# Allegro board RV1126_RV1109_Template_DDR3P216SD4_V10_20200901.brd
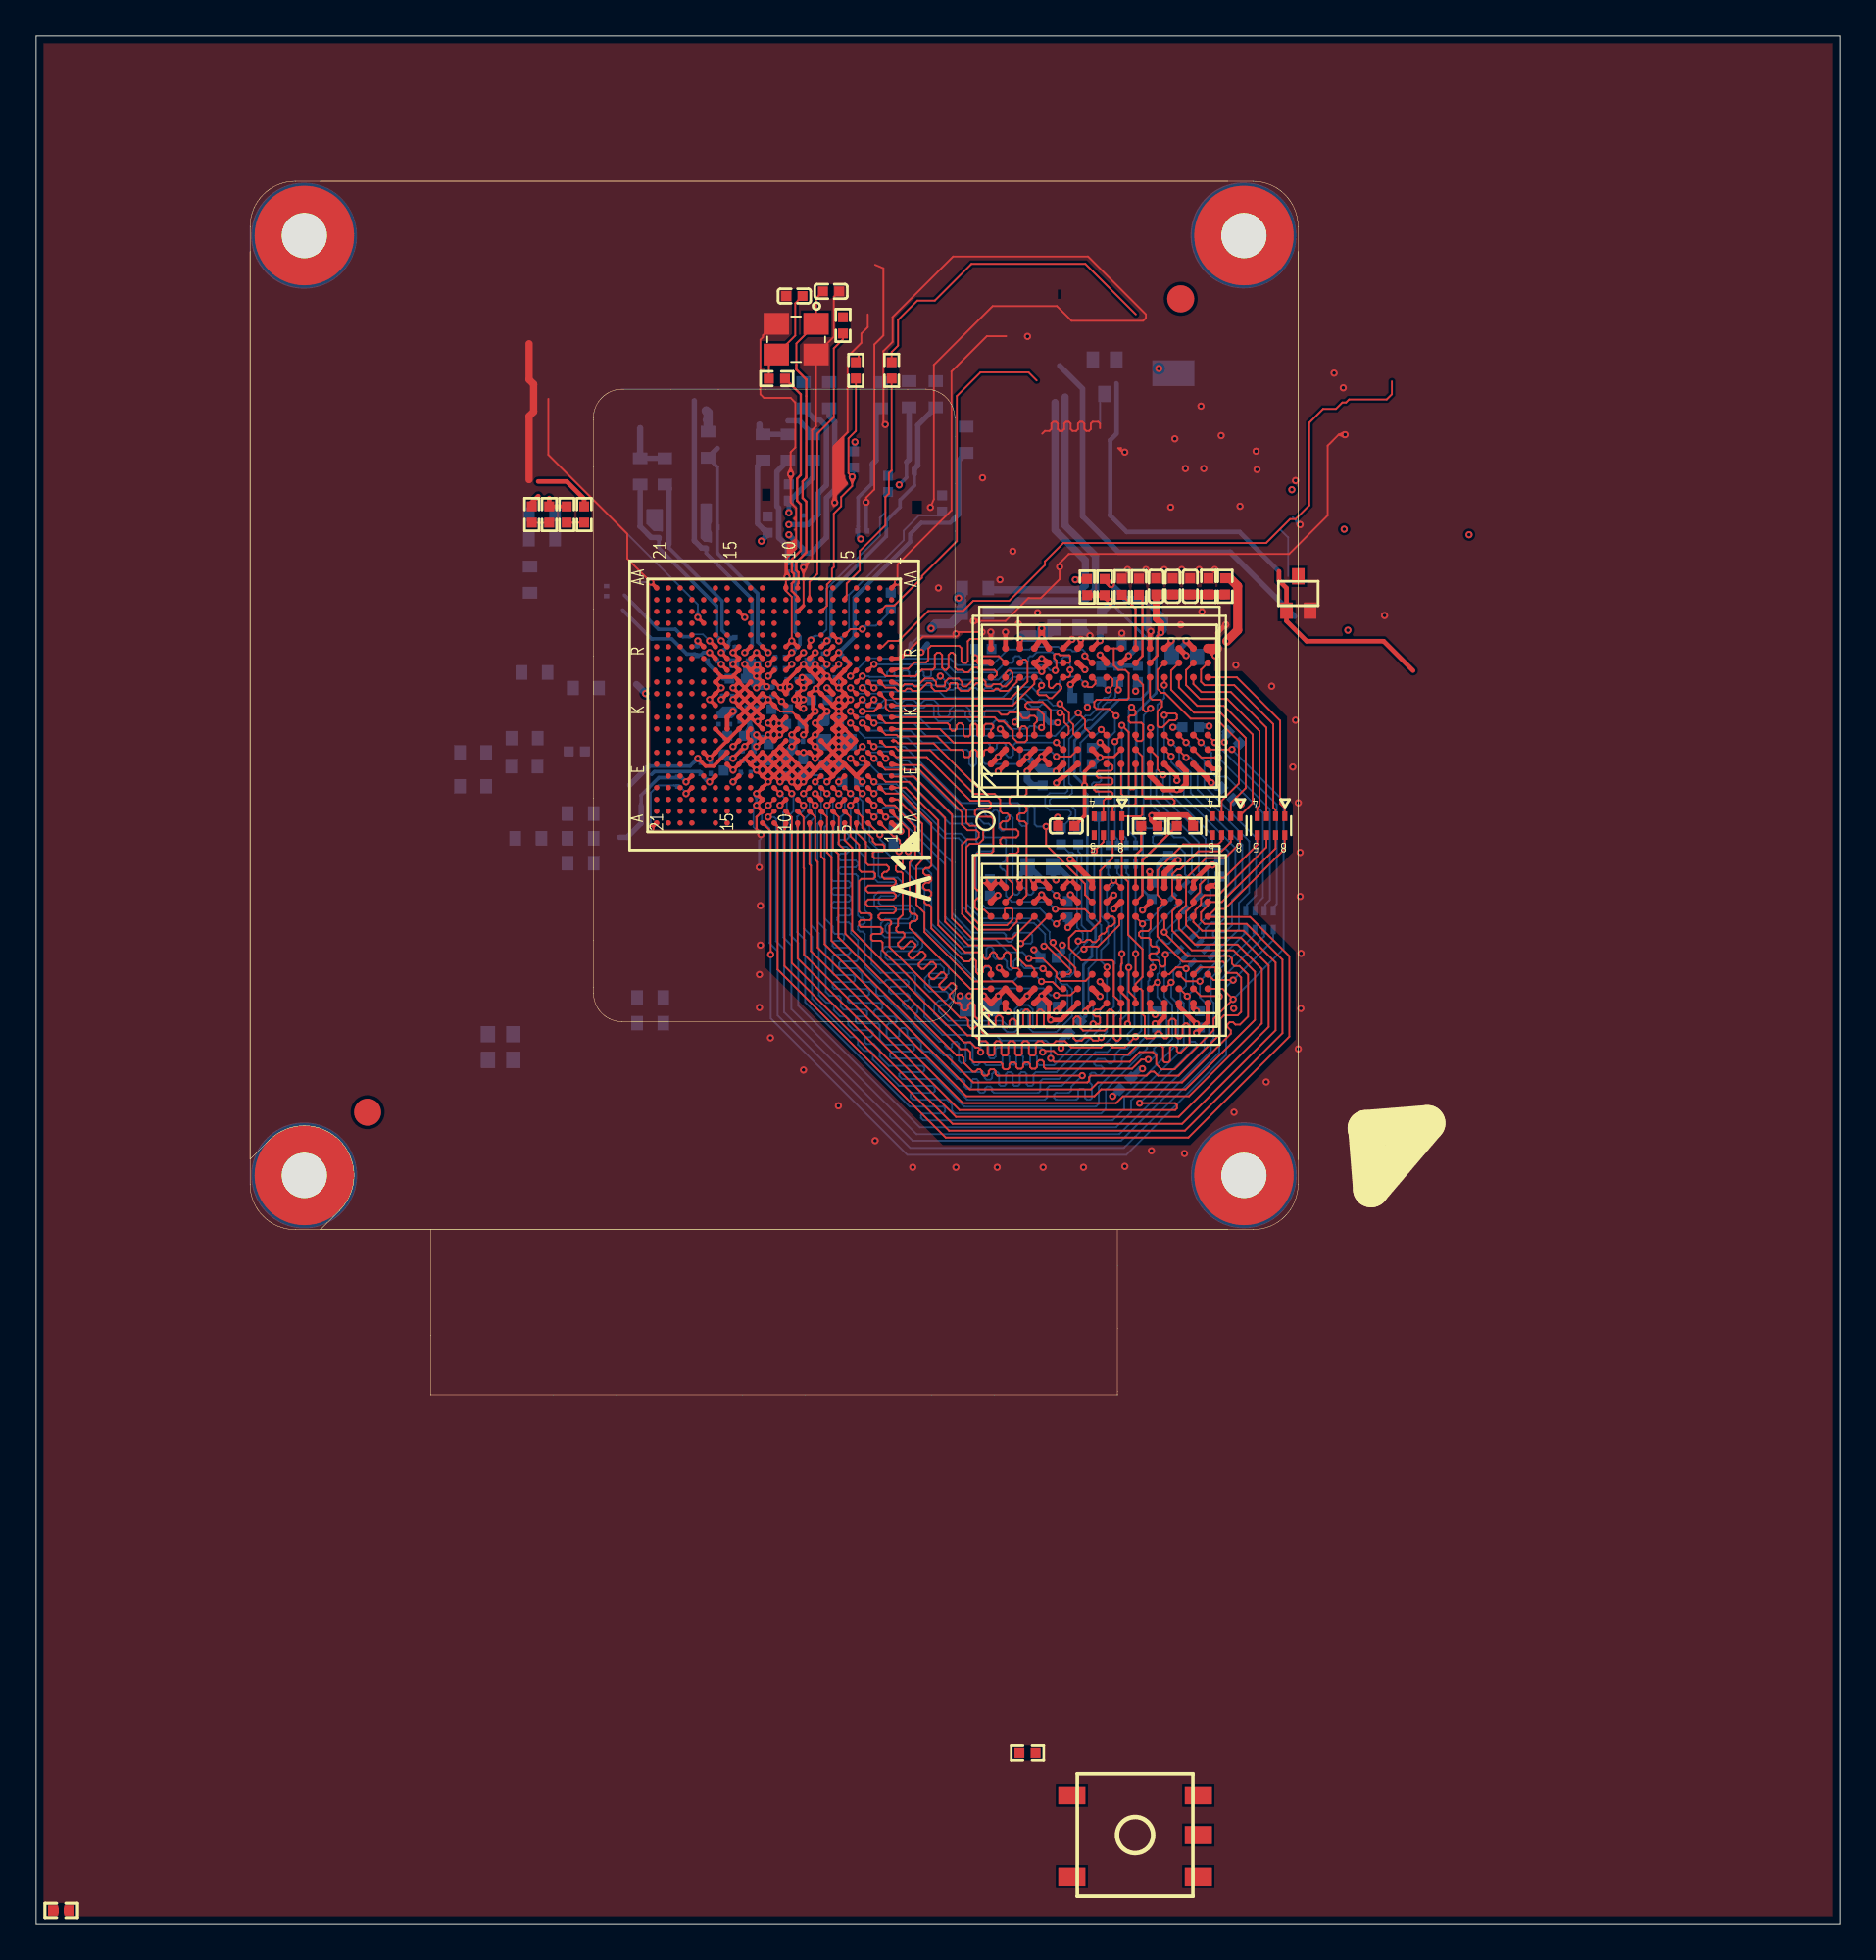
[diagram p0: board, top side]
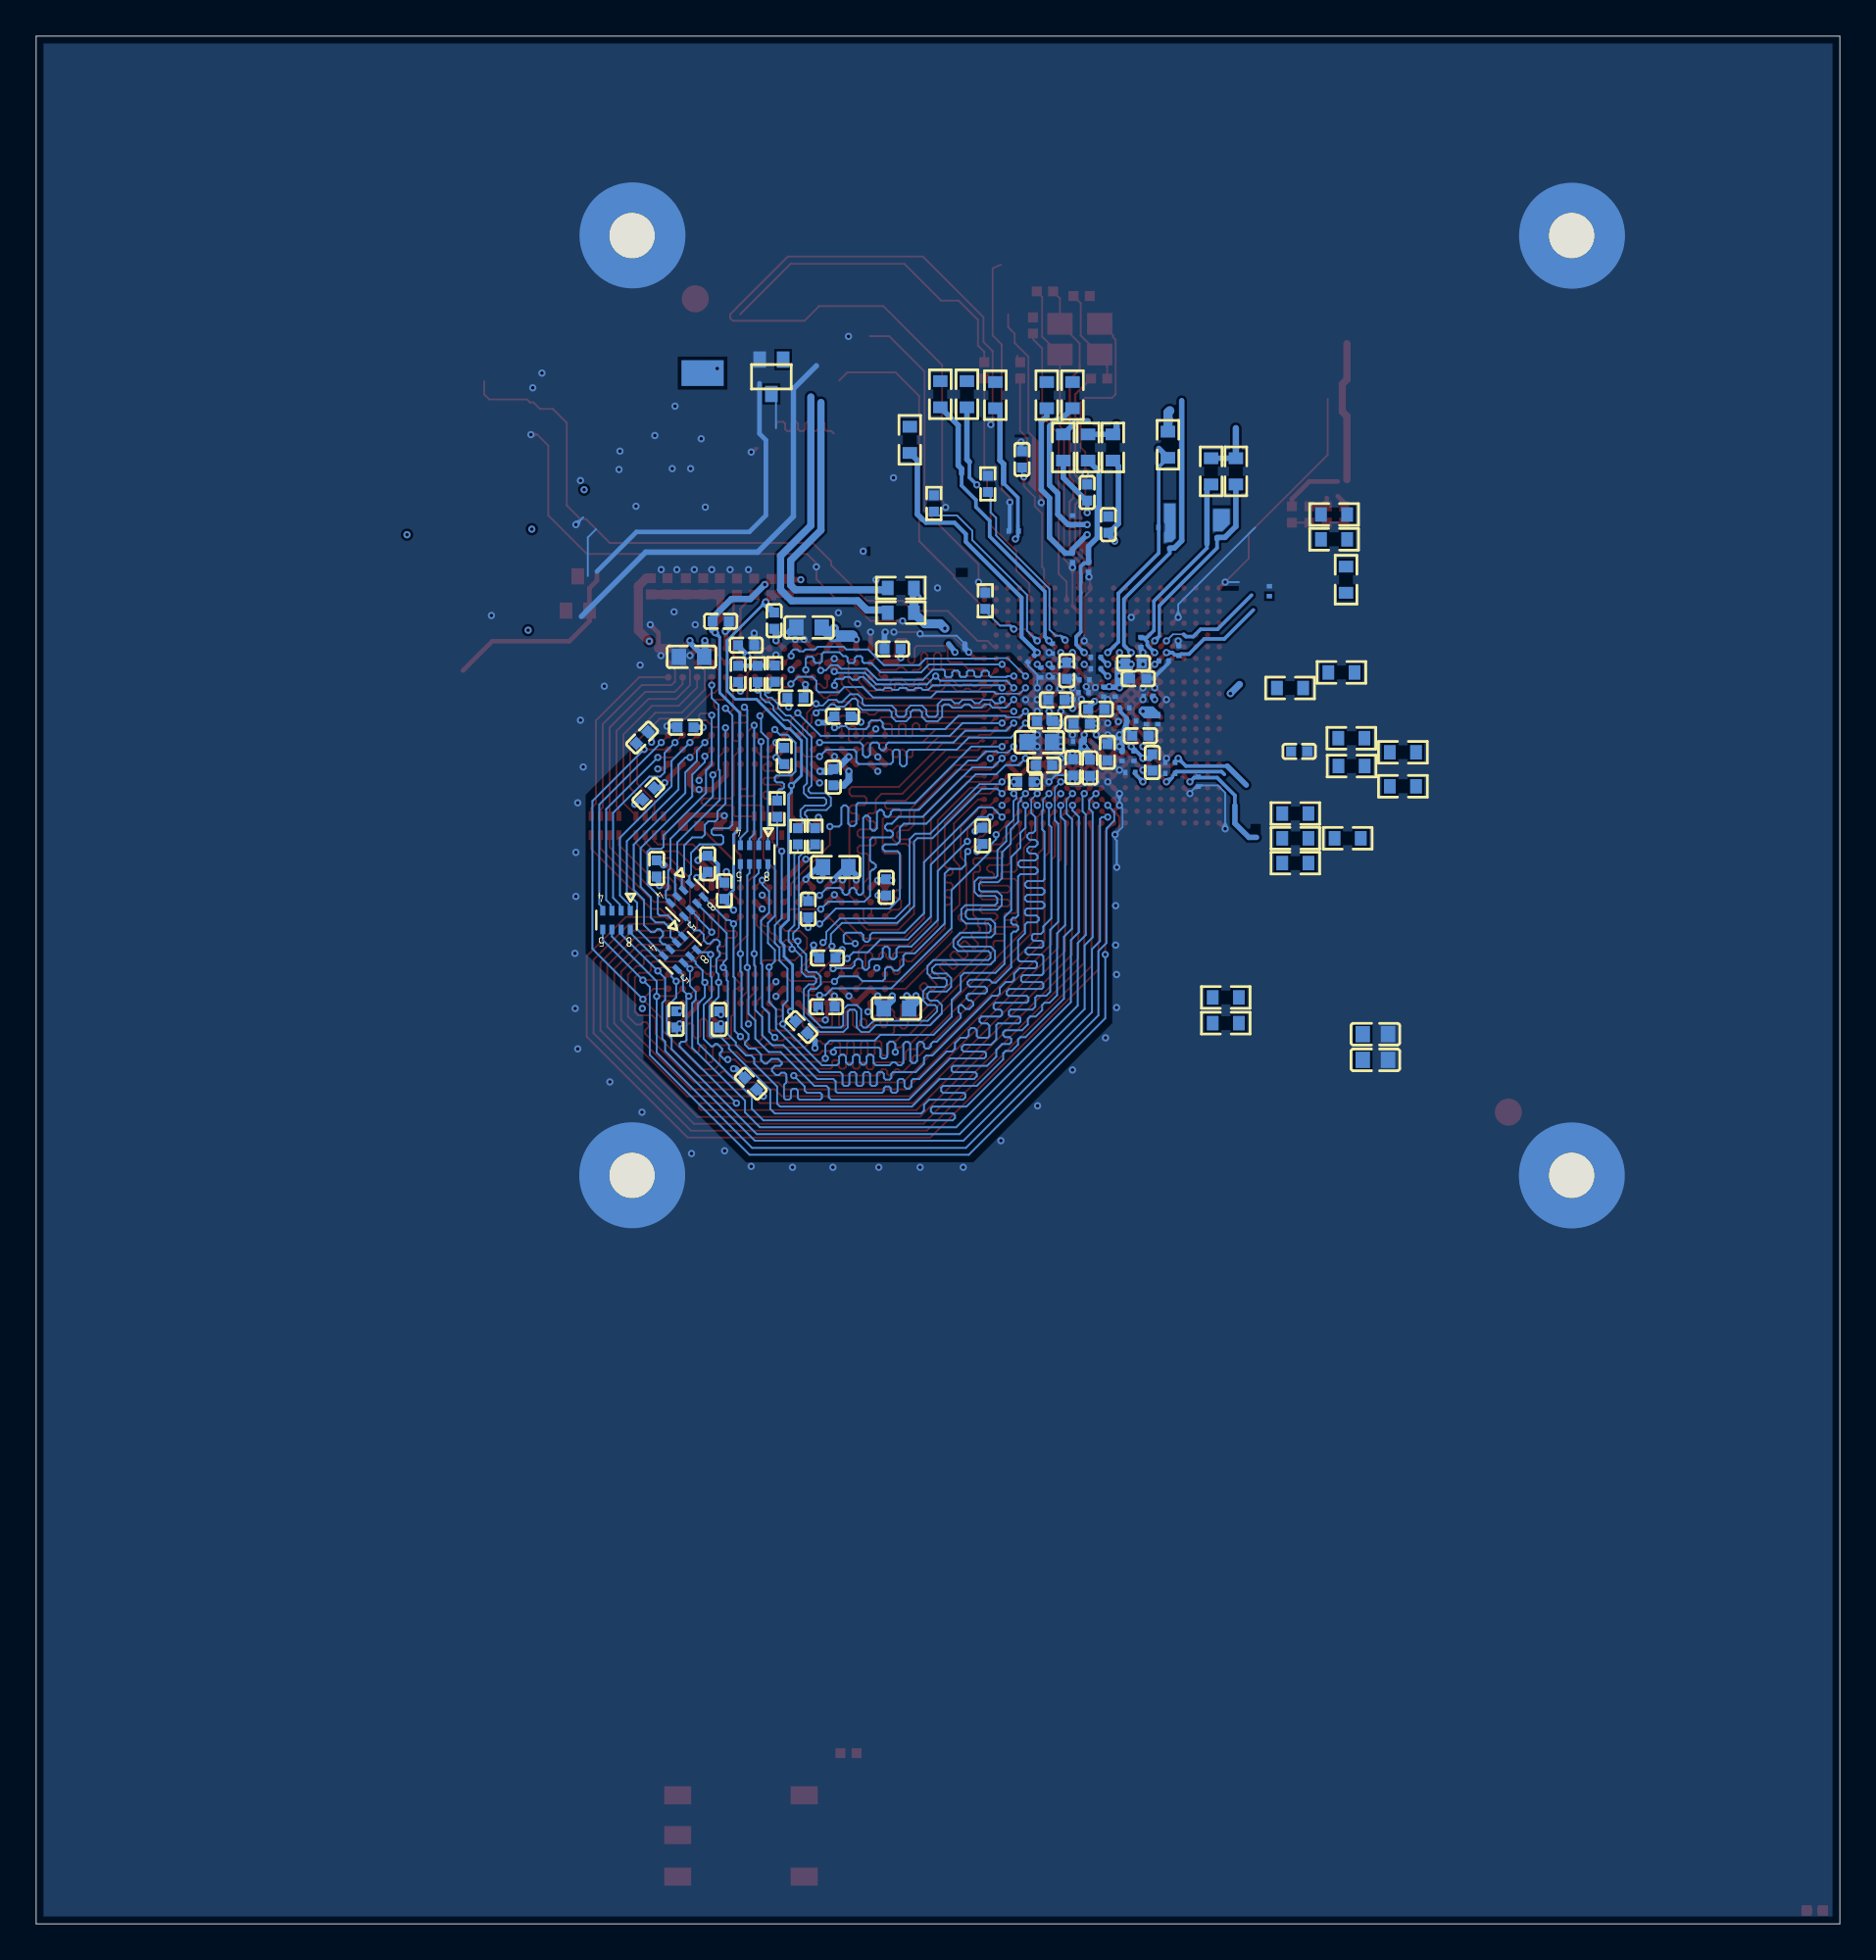
[diagram p1: board, bottom side, seen from below]

Outline 99.82 x 104.44 mm; copper layers: TOP, GND, POWER, BOTTOM. Coordinates in mm from the lower left corner of the outline.
Outline path: 0,104.44 99.82,104.44 99.82,0 0,0 0,104.44

## Placement (name value [footprint] x y rotation side)
C1000  .10  [C0402]  29.92 64.87 180 bottom
C1001  .10  [C0201]  39.73 64.62 270 bottom
C1002  .10  [C0201]  39.22 66.55 180 bottom
C1003  .10  [C0201]  39.6 67.28 180 bottom
C1004  .10  [C0402]  41.96 66.4 0 bottom
C1005  .10  [C0402]  40.54 64.82 270 bottom
C1006  .10  [C0402]  38.71 65.74 180 bottom
C1008  .10  [C0201]  42.16 65.43 0 bottom
C1009  .10  [C0201]  39.07 64.62 270 bottom
C1010  .10  [C0402]  41.15 67.21 180 bottom
C1011  .10  [C0402]  38.05 64.26 270 bottom
C1012  .10  [C0402]  41.5 63.96 270 bottom
C1014  .10  [C0201]  40.74 68.17 270 bottom
C1015  .10  [C0201]  40.11 68.17 270 bottom
C1016  .10  [C0402]  38.83 68.89 180 bottom
C1017  .10  [C0402]  39.09 69.75 180 bottom
C1019  .10  [C0201]  41.86 68.12 180 bottom
C1020  .10  [C0201]  41.81 68.83 180 bottom
C1021  .10  [C0402]  43.36 67.72 0 bottom
C1022  .10  [C0402]  42.78 69.33 90 bottom
C1024  .10  [C0603]  25.7 49.23 180 bottom
C1025  .10  [C0603]  25.7 47.8 180 bottom
C1100  .10  [C0402]  41.96 90.07 180 top
C1101  .10  [C0402]  43.99 90.32 180 top
C1102  .10  [C0201]  41.17 69.44 0 bottom
C1103  .10  [C0402]  45.26 81.03 270 bottom
C1104  .10  [C0201]  42.47 77.65 90 bottom
C1105  .10  [C0201]  42.47 75.62 270 bottom
C1106  .10  [C0201]  41.17 70.08 0 bottom
C1107  .10  [C0201]  41.58 75.08 270 bottom
C1108  .10  [C0201]  45.72 77.06 0 bottom
C1109  .10  [C0402]  41.66 79.2 90 bottom
C1110  .10  [C0402]  40.49 77.42 90 bottom
C1200  .10  [C0201]  1.39 0.74 0 top
C1201  .10  [C0201]  1.39 0.74 0 top
C1202  .10  [C0201]  1.39 0.74 0 top
C1203  .10  [C0402]  42.44 63.98 270 bottom
C1204  .10  [C0402]  44.04 64.11 0 bottom
C1205  .10  [C0402]  43.99 66.55 0 bottom
C1206  .10  [C0603]  44.3 65.38 0 bottom
C1300  .10  [C0201]  37.08 76.35 90 bottom
C1301  .10  [C0201]  44.22 69.24 270 bottom
C1302  .10  [C0201]  39.27 63.7 0 bottom
C1400  .10  [C0201]  43.59 70.56 270 bottom
C1401  .10  [C0201]  43.59 69.24 270 bottom
C1402  .10  [C0201]  44.75 70 315 bottom
C1500  .10  [C0201]  37.06 63.65 0 bottom
C1600  .10  [C0201]  37.41 69.88 180 bottom
C1601  .10  [C0201]  38.25 67.92 0 bottom
C1602  .10  [C0201]  36.58 70.43 90 bottom
C1603  .10  [C0201]  38.68 70.92 270 bottom
C1604  .10  [C0201]  31.57 73.74 90 bottom
C1605  .10  [C0201]  34.47 76.94 90 bottom
C1700  .10  [C0201]  35.51 63.2 270 bottom
C1701  .10  [C0201]  37.06 64.26 0 bottom
C1702  .10  [C0201]  38.38 66.65 270 bottom
C1703  .10  [C0201]  37.74 66.65 270 bottom
C1800  .10  [C0201]  37.44 77.27 180 bottom
C3000  .10  [C0402]  66.28 65.64 315 bottom
C3001  .10  [C0402]  60.97 69.16 270 bottom
C3002  .10  [C0603]  57.05 71.73 0 bottom
C3003  .10  [C0603]  55.58 58.47 0 bottom
C3004  .10  [C0402]  65.94 62.53 315 bottom
C3005  .10  [C0402]  65.48 58.39 270 bottom
C3006  .10  [C0402]  63.89 66.21 0 bottom
C3007  .10  [C0402]  55.19 66.81 0 bottom
C3008  .10  [C0402]  60.53 70.75 180 bottom
C3009  .10  [C0402]  55.7 63.44 270 bottom
C3010  .10  [C0402]  57.1 56.14 90 bottom
C3011  .10  [C0402]  57.8 67.83 0 bottom
C3012  .10  [C0402]  52.43 70.54 0 bottom
C3013  .10  [C0402]  60.27 46.49 225 bottom
C3014  .10  [C0402]  58.42 64.62 90 bottom
C3015  .10  [C0402]  62.9 74 90 top
C3016  .10  [C0402]  61.73 57.16 270 bottom
C3017  .10  [C0402]  61.94 72.07 180 bottom
C3018  .10  [C0402]  61.99 74 90 top
C3019  .10  [C0402]  63.87 74 90 top
C3020  .10  [C0603]  52.21 50.65 180 bottom
C3021  .10  [C0603]  63.55 70.1 0 bottom
C3022  .10  [C0402]  64.4 50.05 270 bottom
C3023  .10  [C0402]  47.45 60.2 90 bottom
C3024  .10  [C0402]  52.78 57.35 90 bottom
C3025  .10  [C0402]  56.08 50.74 180 bottom
C3026  .10  [C0402]  56.03 53.44 0 bottom
C3027  .10  [C0402]  62.66 58.65 270 bottom
C3028  .10  [C0402]  62.03 50.04 90 bottom
C3030  .10  [C0402]  57.46 49.62 225 bottom
C3031  .10  [C0402]  57.01 60.74 180 top
C3032  .10  [C0402]  58.98 72.11 90 bottom
Q1300  VAL  [SOT_323]  69.85 73.61 0 top
Q1301  VAL  [SOT_323]  59.13 85.6 0 bottom
R1000  .10  [R0603]  27.03 64.06 180 bottom
R1001  .10  [R0603]  24.18 62.94 0 bottom
R1100  .10  [R0402]  41 85.5 180 top
R1102  .10  [R0603]  42.98 81.69 90 bottom
R1103  .10  [R0603]  42.47 84.58 90 bottom
R1104  .10  [R0402]  47.15 79.67 90 bottom
R1105  .10  [R0402]  45.36 85.95 90 top
R1106  .10  [R0402]  47.35 85.95 90 top
R1108  .10  [R0603]  43.89 84.58 90 bottom
R1109  .10  [R0402]  44.65 88.44 90 top
R1110  .10  [R0603]  40.23 81.69 90 bottom
R1111  .10  [R0603]  41.61 81.69 90 bottom
R1112  .10  [R0603]  46.74 84.58 90 bottom
R1200  .10  [R0402]  45.07 63.19 0 bottom
R1300  .10  [R0603]  51.97 72.54 180 bottom
R1301  .10  [R0603]  51.97 73.91 180 bottom
R1302  .10  [R0603]  33.99 51.26 0 bottom
R1303  .10  [R0603]  33.99 49.83 0 bottom
R1304  .10  [R0402]  1.39 0.74 0 top
R1305  .10  [R0402]  1.39 0.74 0 top
R1306  .10  [R0402]  54.86 9.45 0 top
R1400  .10  [R0402]  50.14 78.59 90 bottom
R1401  .10  [R0402]  47.29 73.2 90 bottom
R1402  .10  [R0603]  49.78 84.63 270 bottom
R1403  .10  [R0603]  48.31 84.63 270 bottom
R1404  .10  [R0603]  51.47 82.11 270 bottom
R1500  .10  [R0603]  30.13 60.06 0 bottom
R1600  .10  [R0603]  27.33 74.37 270 bottom
R1601  .10  [R0402]  29.36 77.98 90 top
R1602  .10  [R0402]  28.4 77.98 90 top
R1603  .10  [R0603]  30.43 68.38 0 bottom
R1604  .10  [R0603]  27.58 69.24 0 bottom
R1605  .10  [R0603]  27.99 76.61 0 bottom
R1606  .10  [R0603]  34.8 80.37 270 bottom
R1607  .10  [R0603]  27.99 77.98 0 bottom
R1608  .10  [R0603]  33.43 80.37 270 bottom
R1609  .10  [R0402]  30.33 77.98 90 top
R1610  .10  [R0402]  27.43 77.98 90 top
R1700  .10  [R0603]  30.13 58.69 0 bottom
R1701  .10  [R0603]  30.13 61.43 0 bottom
R1702  .10  [R0603]  27.04 65.6 0 bottom
R1705  .10  [R0603]  24.18 64.82 0 bottom
R1800  .10  [R0603]  37.19 81.84 270 bottom
R1801  .10  [R0603]  27.24 60.06 180 bottom
R3000  .10  [R0402]  61.04 73.99 90 top
R3001  .10  [R0402]  63.58 60.74 0 top
R3002  .10  [R0402]  60.08 73.99 90 top
R3003  .10  [R0402]  61.61 60.74 0 top
R3004  .10  [R0402]  58.94 69.17 90 bottom
R3005  .10  [R0402]  59.89 69.16 90 bottom
R3006  .10  [R0402]  65.8 74 270 top
R3007  .10  [R0402]  64.88 74 90 top
R3008  .10  [R0402]  58.81 61.7 270 bottom
R3009  .10  [R0402]  57.67 60.17 270 bottom
R3010  .10  [R0402]  56.72 60.17 270 bottom
R3011  .10  [R0402]  59.13 73.96 270 top
R3012  .10  [R0402]  58.17 73.96 90 top
RP3000  VAL  [RP4_0408]  68.34 60.76 180 top
RP3001  VAL  [RP4_0408]  65.86 60.76 180 top
RP3002  VAL  [RP4_0408]  59.32 60.76 180 top
RP3003  VAL  [RP4_0408]  67.7 55.54 0 bottom
RP3004  VAL  [RP4_0408]  64.18 53.73 315 bottom
RP3005  VAL  [RP4_0408]  63.8 56.65 315 bottom
RP3006  VAL  [RP4_0408]  60.08 59.16 0 bottom
SW1300  -  [SW-5P]  60.82 4.92 180 top
U1000  -  [BGA409_58R00X58R00X42R69_S]  40.84 67.41 90 top
U3000  VAL  [FBGA96_14R00X11R00X1R20]  58.84 67.37 90 top
U3001  VAL  [FBGA96_14R00X11R00X1R20]  58.84 54.14 90 top
Y1100  VAL  [CRY4_3R20X2R50X0R80]  42.06 87.68 180 top

## Library data of the parts
C1000 C1004-C1006 C1010-C1012 C1016 C1017 C1021 C1022 C1100 C1101 C1103 C1109 C1110 C1203-C1205 C3000 C3001 C3004-C3019 C3022-C3028 C3030-C3032 = C0402
C1001-C1003 C1008 C1009 C1014 C1015 C1019 C1020 C1102 C1104-C1108 C1200-C1202 C1300-C1302 C1400-C1402 C1500 C1600-C1605 C1700-C1703 C1800 = C0201
C1024 C1025 C1206 C3002 C3003 C3020 C3021 = C0603
Q1300 Q1301 = SOT_323
R1000 R1001 R1102 R1103 R1108 R1110-R1112 R1300-R1303 R1402-R1404 R1500 R1600 R1603-R1608 R1700-R1702 R1705 R1800 R1801 = R0603
R1100 R1104-R1106 R1109 R1200 R1304-R1306 R1400 R1401 R1601 R1602 R1609 R1610 R3000-R3012 = R0402
RP3000-RP3006 = RP4_0408
SW1300 = SW-5P
U1000 = BGA409_58R00X58R00X42R69_S
U3000 U3001 = FBGA96_14R00X11R00X1R20
Y1100 = CRY4_3R20X2R50X0R80

## Footprints (pads in the part's own frame, mm; a bottom-side part is the same pattern mirrored in y, then rotated)
BGA409_58R00X58R00X42R69_S
  round 0.3 smd: A1(-6.5,-6.5) A2(-6.5,-5.85) A3(-6.5,-5.2) A4(-6.5,-4.55) A5(-6.5,-3.9) A6(-6.5,-3.25) A7(-6.5,-2.6) A8(-6.5,-1.95) A9(-6.5,-1.3) A10(-6.5,-0.65) A11(-6.5,0) A12(-6.5,0.65) A13(-6.5,1.3) A15(-6.5,2.6) A16(-6.5,3.25) A18(-6.5,4.55) A19(-6.5,5.2) A20(-6.5,5.85) A21(-6.5,6.5) AA1(6.5,-6.5) AA2(6.5,-5.85) AA3(6.5,-5.2) AA4(6.5,-4.55) AA6(6.5,-3.25) AA7(6.5,-2.6) AA9(6.5,-1.3) AA10(6.5,-0.65) AA12(6.5,0.65) AA13(6.5,1.3) AA15(6.5,2.6) AA16(6.5,3.25) AA18(6.5,4.55) AA19(6.5,5.2) AA20(6.5,5.85) AA21(6.5,6.5) B1(-5.85,-6.5) B2(-5.85,-5.85) B3(-5.85,-5.2) B4(-5.85,-4.55) B5(-5.85,-3.9) B6(-5.85,-3.25) B7(-5.85,-2.6) B8(-5.85,-1.95) B9(-5.85,-1.3) B10(-5.85,-0.65) B11(-5.85,0) B12(-5.85,0.65) B13(-5.85,1.3) B14(-5.85,1.95) B15(-5.85,2.6) B16(-5.85,3.25) B17(-5.85,3.9) B18(-5.85,4.55) B19(-5.85,5.2) B20(-5.85,5.85) B21(-5.85,6.5) C1(-5.2,-6.5) C2(-5.2,-5.85) C3(-5.2,-5.2) C4(-5.2,-4.55) C5(-5.2,-3.9) C6(-5.2,-3.25) C7(-5.2,-2.6) C8(-5.2,-1.95) C9(-5.2,-1.3) C10(-5.2,-0.65) C11(-5.2,0) C12(-5.2,0.65) C13(-5.2,1.3) C14(-5.2,1.95) C15(-5.2,2.6) C16(-5.2,3.25) C17(-5.2,3.9) C18(-5.2,4.55) C19(-5.2,5.2) C20(-5.2,5.85) C21(-5.2,6.5) D1(-4.55,-6.5) D2(-4.55,-5.85) D3(-4.55,-5.2) D4(-4.55,-4.55) D5(-4.55,-3.9) D6(-4.55,-3.25) D7(-4.55,-2.6) D8(-4.55,-1.95) D9(-4.55,-1.3) D10(-4.55,-0.65) D11(-4.55,0) D12(-4.55,0.65) D13(-4.55,1.3) D14(-4.55,1.95) D15(-4.55,2.6) D16(-4.55,3.25) D17(-4.55,3.9) D18(-4.55,4.55) D19(-4.55,5.2) D20(-4.55,5.85) D21(-4.55,6.5) E1(-3.9,-6.5) E2(-3.9,-5.85) E3(-3.9,-5.2) E4(-3.9,-4.55) E5(-3.9,-3.9) E6(-3.9,-3.25) E7(-3.9,-2.6) E8(-3.9,-1.95) E9(-3.9,-1.3) E10(-3.9,-0.65) E11(-3.9,0) E12(-3.9,0.65) E13(-3.9,1.3) E14(-3.9,1.95) E16(-3.9,3.25) E17(-3.9,3.9) E18(-3.9,4.55) E19(-3.9,5.2) E20(-3.9,5.85) F1(-3.25,-6.5) F2(-3.25,-5.85) F3(-3.25,-5.2) F4(-3.25,-4.55) F5(-3.25,-3.9) F6(-3.25,-3.25) F7(-3.25,-2.6) F8(-3.25,-1.95) F9(-3.25,-1.3) F10(-3.25,-0.65) F11(-3.25,0) F12(-3.25,0.65) F13(-3.25,1.3) F14(-3.25,1.95) F15(-3.25,2.6) F19(-3.25,5.2) F20(-3.25,5.85) F21(-3.25,6.5) G1(-2.6,-6.5) G2(-2.6,-5.85) G3(-2.6,-5.2) G4(-2.6,-4.55) G5(-2.6,-3.9) G6(-2.6,-3.25) G7(-2.6,-2.6) G8(-2.6,-1.95) G9(-2.6,-1.3) G10(-2.6,-0.65) G11(-2.6,0) G12(-2.6,0.65) G13(-2.6,1.3) G15(-2.6,2.6) G16(-2.6,3.25) G17(-2.6,3.9) G18(-2.6,4.55) G19(-2.6,5.2) G20(-2.6,5.85) G21(-2.6,6.5) H7(-1.95,-2.6) H8(-1.95,-1.95) H9(-1.95,-1.3) H10(-1.95,-0.65) H11(-1.95,0) H12(-1.95,0.65) H13(-1.95,1.3) H14(-1.95,1.95) H15(-1.95,2.6) H16(-1.95,3.25) H17(-1.95,3.9) H18(-1.95,4.55) H19(-1.95,5.2) H20(-1.95,5.85) J1(-1.3,-6.5) J2(-1.3,-5.85) J3(-1.3,-5.2) J4(-1.3,-4.55) J5(-1.3,-3.9) J6(-1.3,-3.25) J7(-1.3,-2.6) J9(-1.3,-1.3) J10(-1.3,-0.65) J11(-1.3,0) J12(-1.3,0.65) J13(-1.3,1.3) J14(-1.3,1.95) J15(-1.3,2.6) J16(-1.3,3.25) J17(-1.3,3.9) J18(-1.3,4.55) J19(-1.3,5.2) J20(-1.3,5.85) J21(-1.3,6.5) K1(-0.65,-6.5) K2(-0.65,-5.85) K3(-0.65,-5.2) K4(-0.65,-4.55) K5(-0.65,-3.9) K6(-0.65,-3.25) K7(-0.65,-2.6) K8(-0.65,-1.95) K9(-0.65,-1.3) K10(-0.65,-0.65) K11(-0.65,0) K12(-0.65,0.65) K13(-0.65,1.3) K14(-0.65,1.95) K15(-0.65,2.6) K16(-0.65,3.25) K17(-0.65,3.9) K18(-0.65,4.55) K19(-0.65,5.2) K20(-0.65,5.85) K21(-0.65,6.5) L1(0,-6.5) L2(0,-5.85) L3(0,-5.2) L4(0,-4.55) L5(0,-3.9) L6(0,-3.25) L7(0,-2.6) L9(0,-1.3) L10(0,-0.65) L11(0,0) L12(0,0.65) L13(0,1.3) L14(0,1.95) L16(0,3.25) L17(0,3.9) L19(0,5.2) L20(0,5.85) M1(0.65,-6.5) M2(0.65,-5.85) M3(0.65,-5.2) M4(0.65,-4.55) M5(0.65,-3.9) M6(0.65,-3.25) M7(0.65,-2.6) M8(0.65,-1.95) M9(0.65,-1.3) M10(0.65,-0.65) M11(0.65,0) M12(0.65,0.65) M13(0.65,1.3) M14(0.65,1.95) M15(0.65,2.6) M16(0.65,3.25) M17(0.65,3.9) M18(0.65,4.55) M19(0.65,5.2) M20(0.65,5.85) M21(0.65,6.5) N1(1.3,-6.5) N2(1.3,-5.85) N3(1.3,-5.2) N4(1.3,-4.55) N5(1.3,-3.9) N6(1.3,-3.25) N7(1.3,-2.6) N8(1.3,-1.95) N9(1.3,-1.3) N10(1.3,-0.65) N11(1.3,0) N12(1.3,0.65) N13(1.3,1.3) N14(1.3,1.95) N16(1.3,3.25) N17(1.3,3.9) N18(1.3,4.55) N19(1.3,5.2) N20(1.3,5.85) N21(1.3,6.5) P1(1.95,-6.5) P2(1.95,-5.85) P3(1.95,-5.2) P4(1.95,-4.55) P5(1.95,-3.9) P6(1.95,-3.25) P7(1.95,-2.6) P8(1.95,-1.95) P9(1.95,-1.3) P10(1.95,-0.65) P11(1.95,0) P12(1.95,0.65) P13(1.95,1.3) P14(1.95,1.95) P15(1.95,2.6) P16(1.95,3.25) P17(1.95,3.9) P19(1.95,5.2) P20(1.95,5.85) R1(2.6,-6.5) R2(2.6,-5.85) R3(2.6,-5.2) R4(2.6,-4.55) R5(2.6,-3.9) R6(2.6,-3.25) R7(2.6,-2.6) R8(2.6,-1.95) R9(2.6,-1.3) R10(2.6,-0.65) R11(2.6,0) R12(2.6,0.65) R13(2.6,1.3) R14(2.6,1.95) R15(2.6,2.6) R16(2.6,3.25) R17(2.6,3.9) R18(2.6,4.55) R19(2.6,5.2) R20(2.6,5.85) R21(2.6,6.5) T1(3.25,-6.5) T2(3.25,-5.85) T3(3.25,-5.2) T4(3.25,-4.55) T6(3.25,-3.25) T7(3.25,-2.6) T8(3.25,-1.95) T9(3.25,-1.3) T10(3.25,-0.65) T11(3.25,0) T12(3.25,0.65) T13(3.25,1.3) T14(3.25,1.95) T15(3.25,2.6) T16(3.25,3.25) T17(3.25,3.9) T18(3.25,4.55) T19(3.25,5.2) T20(3.25,5.85) T21(3.25,6.5) U2(3.9,-5.85) U3(3.9,-5.2) U4(3.9,-4.55) U5(3.9,-3.9) U6(3.9,-3.25) U7(3.9,-2.6) U9(3.9,-1.3) U11(3.9,0) U12(3.9,0.65) U13(3.9,1.3) U15(3.9,2.6) U16(3.9,3.25) U18(3.9,4.55) U19(3.9,5.2) U20(3.9,5.85) V1(4.55,-6.5) V2(4.55,-5.85) V3(4.55,-5.2) V4(4.55,-4.55) V5(4.55,-3.9) V6(4.55,-3.25) V7(4.55,-2.6) V9(4.55,-1.3) V11(4.55,0) V12(4.55,0.65) V13(4.55,1.3) V15(4.55,2.6) V16(4.55,3.25) V17(4.55,3.9) V18(4.55,4.55) V19(4.55,5.2) V20(4.55,5.85) V21(4.55,6.5) W1(5.2,-6.5) W2(5.2,-5.85) W3(5.2,-5.2) W4(5.2,-4.55) W5(5.2,-3.9) W6(5.2,-3.25) W7(5.2,-2.6) W8(5.2,-1.95) W9(5.2,-1.3) W10(5.2,-0.65) W11(5.2,0) W12(5.2,0.65) W13(5.2,1.3) W14(5.2,1.95) W15(5.2,2.6) W16(5.2,3.25) W17(5.2,3.9) W18(5.2,4.55) W19(5.2,5.2) W20(5.2,5.85) W21(5.2,6.5) Y1(5.85,-6.5) Y2(5.85,-5.85) Y3(5.85,-5.2) Y4(5.85,-4.55) Y5(5.85,-3.9) Y6(5.85,-3.25) Y7(5.85,-2.6) Y8(5.85,-1.95) Y9(5.85,-1.3) Y10(5.85,-0.65) Y11(5.85,0) Y12(5.85,0.65) Y13(5.85,1.3) Y14(5.85,1.95) Y15(5.85,2.6) Y16(5.85,3.25) Y17(5.85,3.9) Y18(5.85,4.55) Y19(5.85,5.2) Y20(5.85,5.85) Y21(5.85,6.5)
  round 5.5 hole 2.5: H01(26,26) H02(-26,26) H03(-26,-26) H04(26,-26)
  round 1.5 smd: H05(22.5,-22.5) H06(-22.5,22.5)
C0201
  rect 0.25x0.3 smd: 1(-0.275,0) 2(0.275,0)
C0402
  rect 0.55x0.55 smd: 1(-0.45,0) 2(0.45,0)
C0603
  rect 0.8x0.9 smd: 1(-0.7,0) 2(0.7,0)
CRY4_3R20X2R50X0R80
  rect 1.4x1.2 smd: 1(-1.1,-0.85) 2(1.1,-0.85) 3(1.1,0.85) 4(-1.1,0.85)
FBGA96_14R00X11R00X1R20
  round 0.38 smd: A1(-3.2,6) A2(-2.4,6) A3(-1.6,6) A7(1.6,6) A8(2.4,6) A9(3.2,6) B1(-3.2,5.2) B2(-2.4,5.2) B3(-1.6,5.2) B7(1.6,5.2) B8(2.4,5.2) B9(3.2,5.2) C1(-3.2,4.4) C2(-2.4,4.4) C3(-1.6,4.4) C7(1.6,4.4) C8(2.4,4.4) C9(3.2,4.4) D1(-3.2,3.6) D2(-2.4,3.6) D3(-1.6,3.6) D7(1.6,3.6) D8(2.4,3.6) D9(3.2,3.6) E1(-3.2,2.8) E2(-2.4,2.8) E3(-1.6,2.8) E7(1.6,2.8) E8(2.4,2.8) E9(3.2,2.8) F1(-3.2,2) F2(-2.4,2) F3(-1.6,2) F7(1.6,2) F8(2.4,2) F9(3.2,2) G1(-3.2,1.2) G2(-2.4,1.2) G3(-1.6,1.2) G7(1.6,1.2) G8(2.4,1.2) G9(3.2,1.2) H1(-3.2,0.4) H2(-2.4,0.4) H3(-1.6,0.4) H7(1.6,0.4) H8(2.4,0.4) H9(3.2,0.4) J1(-3.2,-0.4) J2(-2.4,-0.4) J3(-1.6,-0.4) J7(1.6,-0.4) J8(2.4,-0.4) J9(3.2,-0.4) K1(-3.2,-1.2) K2(-2.4,-1.2) K3(-1.6,-1.2) K7(1.6,-1.2) K8(2.4,-1.2) K9(3.2,-1.2) L1(-3.2,-2) L2(-2.4,-2) L3(-1.6,-2) L7(1.6,-2) L8(2.4,-2) L9(3.2,-2) M1(-3.2,-2.8) M2(-2.4,-2.8) M3(-1.6,-2.8) M7(1.6,-2.8) M8(2.4,-2.8) M9(3.2,-2.8) N1(-3.2,-3.6) N2(-2.4,-3.6) N3(-1.6,-3.6) N7(1.6,-3.6) N8(2.4,-3.6) N9(3.2,-3.6) P1(-3.2,-4.4) P2(-2.4,-4.4) P3(-1.6,-4.4) P7(1.6,-4.4) P8(2.4,-4.4) P9(3.2,-4.4) R1(-3.2,-5.2) R2(-2.4,-5.2) R3(-1.6,-5.2) R7(1.6,-5.2) R8(2.4,-5.2) R9(3.2,-5.2) T1(-3.2,-6) T2(-2.4,-6) T3(-1.6,-6) T7(1.6,-6) T8(2.4,-6) T9(3.2,-6)
R0402
  rect 0.55x0.55 smd: 1(-0.45,0) 2(0.45,0)
R0603
  rect 0.65x0.8 smd: 1(-0.725,0) 2(0.725,0)
RP4_0408
  rect 0.279x0.533 smd: 1(-0.762,-0.521) 2(-0.254,-0.521) 3(0.254,-0.521) 4(0.762,-0.521) 5(0.762,0.521) 6(0.254,0.521) 7(-0.254,0.521) 8(-0.762,0.521)
SOT_323
  rect 0.7x0.9 smd: 1(-0.65,-0.95) 2(0.65,-0.95) 3(0,0.95)
SW-5P
  rect 1.5x1 smd: 1(-3.5,2.3) 2(-3.5,-2.2) 3(3.5,-2.2) 4(3.5,2.3) 5(-3.5,0)

## Nets
GND: C1000.2 C1001.2 C1002.2 C1003.2 C1004.2 C1005.2 C1006.2 C1008.2 C1009.2 C1010.2 C1011.2 C1012.2 C1014.2 C1015.2 C1016.2 C1017.2 C1019.2 C1020.2 C1021.2 C1022.2 C1024.2 C1025.2 C1100.2 C1101.1 C1102.2 C1103.1 C1104.2 C1105.2 C1106.2 C1107.2 C1108.2 C1109.2 C1110.2 C1200.2 C1201.2 C1202.2 C1203.2 C1204.2 C1205.2 C1206.2 C1300.2 C1301.2 C1302.2 C1400.2 C1401.2 C1402.2 C1500.2 C1600.2 C1601.2 C1602.2 C1603.2 C1604.2 C1605.2 C1700.2 C1701.2 C1702.2 C1703.2 C1800.2 C3000.1 C3001.2 C3002.2 C3003.2 C3004.2 C3005.2 C3006.2 C3007.2 C3008.2 C3009.2 C3010.2 C3011.2 C3012.2 C3013.2 C3014.2 C3015.2 C3017.2 C3018.2 C3019.2 C3020.2 C3021.2 C3022.2 C3023.2 C3024.2 C3025.2 C3026.2 C3027.2 C3028.2 C3030.2 C3031.2 Q1300.2 Q1301.2 R1104.2 R1200.2 R1304.2 R1400.2 R1401.2 R3000.2 R3001.2 R3002.2 R3003.2 R3007.2 U1000.A1 U1000.A21 U1000.AA1 U1000.AA10 U1000.AA21 U1000.B12 U1000.C3 U1000.C5 U1000.C7 U1000.C10 U1000.C12 U1000.D9 U1000.D12 U1000.D18 U1000.E4 U1000.E6 U1000.E8 U1000.E9 U1000.E10 U1000.E11 U1000.E12 U1000.F3 U1000.F5 U1000.F6 U1000.F7 U1000.F8 U1000.F9 U1000.F10 U1000.F11 U1000.F12 U1000.F13 U1000.F14 U1000.F15 U1000.G2 U1000.G5 U1000.G6 U1000.G10 U1000.G11 U1000.G12 U1000.G13 U1000.G16 U1000.G17 U1000.H7 U1000.H10 U1000.H15 U1000.J5 U1000.J6 U1000.J12 U1000.J14 U1000.J16 U1000.K5 U1000.K6 U1000.K8 U1000.K9 U1000.K12 U1000.K13 U1000.K14 U1000.L2 U1000.L5 U1000.L6 U1000.L11 U1000.L12 U1000.L13 U1000.L14 U1000.L16 U1000.M3 U1000.M5 U1000.M7 U1000.M8 U1000.M10 U1000.M12 U1000.M13 U1000.M14 U1000.M16 U1000.N5 U1000.N6 U1000.N7 U1000.N10 U1000.N11 U1000.N13 U1000.N14 U1000.N16 U1000.P5 U1000.P7 U1000.P8 U1000.P9 U1000.P14 U1000.P16 U1000.R1 U1000.R5 U1000.R12 U1000.R13 U1000.R14 U1000.T6 U1000.T9 U1000.T10 U1000.T14 U1000.T17 U1000.V17 U1000.W9 U1000.W14 U3000.A9 U3000.B1 U3000.B3 U3000.B9 U3000.D1 U3000.D8 U3000.E1 U3000.E2 U3000.E8 U3000.F9 U3000.G1 U3000.G8 U3000.G9 U3000.J2 U3000.J8 U3000.M1 U3000.M9 U3000.P1 U3000.P9 U3000.T1 U3000.T9 U3001.A9 U3001.B1 U3001.B3 U3001.B9 U3001.D1 U3001.D8 U3001.E1 U3001.E2 U3001.E8 U3001.F9 U3001.G1 U3001.G8 U3001.G9 U3001.J2 U3001.J8 U3001.M1 U3001.M9 U3001.P1 U3001.P9 U3001.T1 U3001.T9 Y1100.2 Y1100.4
VCC0V8_PMU: R1102.2 R1103.2
VCC1V8_PMU: R1001.1 R1108.2 R1110.2 R1111.2 R1303.1
VCC_0V8: R1404.1 R1606.1 R1608.1 R1700.1
VCC_1V8: R1000.2 R1300.1 R1302.1 R1403.1 R1500.1 R1600.1 R1603.1 R1605.1 R1607.1 R1701.1 R1705.1 R1801.1
VCC_3V3: R1301.1 R1402.1 R1604.1 R1702.1 R1800.1
VCC_DDR: C1200.1 C1201.1 C1202.1 C1203.1 C1204.1 C1205.1 C1206.1 C3002.1 C3003.1 C3004.1 C3005.1 C3006.1 C3007.1 C3008.1 C3009.1 C3010.1 C3011.1 C3012.1 C3013.1 C3014.1 C3016.1 C3020.1 C3021.1 C3022.1 C3023.1 C3024.1 C3025.1 C3026.1 C3027.1 C3028.1 C3032.1 R3006.1 U1000.G7 U1000.G8 U1000.G9 U1000.H8 U1000.J7 U1000.K7 U1000.L7 U3000.A1 U3000.A8 U3000.B2 U3000.C1 U3000.C9 U3000.D2 U3000.D9 U3000.E9 U3000.F1 U3000.G7 U3000.H2 U3000.H9 U3000.K2 U3000.K8 U3000.N1 U3000.N9 U3000.R1 U3000.R9 U3001.A1 U3001.A8 U3001.B2 U3001.C1 U3001.C9 U3001.D2 U3001.D9 U3001.E9 U3001.F1 U3001.G7 U3001.H2 U3001.H9 U3001.K2 U3001.K8 U3001.N1 U3001.N9 U3001.R1 U3001.R9
VCC_DOVDD: R1609.2 R1610.2
VCCIO3_VDD: C1302.1 R1302.2 R1303.2 U1000.E14
VCCIO4_VDD: C1600.1 R1600.2 R1601.2 R1602.2 U1000.P15
VCCIO5_VDD: C1702.1 C1703.1 R1702.2 R1705.2 U1000.J15 U1000.K15
VCCIO6_VDD: C1601.1 R1603.2 R1604.2 U1000.M15
VCCIO7_VDD: C1800.1 R1800.2 R1801.2 U1000.T12
VCCIO_FLASH: C1301.1 R1300.2 R1301.2 U1000.P6
VCCIO_SD: C1300.1 U1000.T13
VCCIO_VDD_1V8: C1000.1 R1000.1 R1001.2 U1000.H14
VDD_ARM: C1014.1 C1015.1 C1016.1 C1017.1 U1000.N12 U1000.P12 U1000.P13
VDD_LOGIC: C1008.1 C1009.1 C1010.1 C1011.1 C1012.1 U1000.H9 U1000.H13 U1000.J9 U1000.J13 U1000.L10 U1000.M11
VDD_NPU_VEPU: C1001.1 C1002.1 C1003.1 C1004.1 C1005.1 C1006.1 C1019.1 C1020.1 C1021.1 C1022.1 C1024.1 C1025.1 U1000.H11 U1000.H12 U1000.J10 U1000.J11 U1000.K10 U1000.K11 U1000.L9 U1000.M9 U1000.N8 U1000.N9
ADC_AVDD_1V8: C1500.1 R1500.2 U1000.E16
DDR3-A0: RP3004.3 U3000.N3
DDR3-A1: RP3001.1 U3000.P7
DDR3-A2: RP3003.1 U3000.P3
DDR3-A3: RP3004.2 U3000.N2
DDR3-A4: RP3001.2 U3000.P8
DDR3-A5: RP3004.4 U3000.P2
DDR3-A6: RP3000.4 U3000.R8
DDR3-A7: RP3003.3 U3000.R2
DDR3-A8: RP3000.2 U3000.T8
DDR3-A9: RP3003.2 U3000.R3
DDR3-A10: RP3005.1 U3000.L7
DDR3-A11: RP3000.3 U3000.R7
DDR3-A12: RP3005.3 U3000.N7
DDR3-A13: RP3003.4 U3000.T3
DDR3-A14: RP3000.1 U3000.T7
DDR3-A15: RP3004.1 U3000.M7
DDR3-BA0: RP3005.4 U3000.M2
DDR3-BA1: RP3001.3 U3000.N8
DDR3-BA2: RP3005.2 U3000.M3
DDR3-CASN: RP3006.2 U3000.K3
DDR3-CKE: RP3006.1 U3000.J9 U3000.K9
DDR3-CLKN: R3005.1 R3009.1 U3000.K7
DDR3-CLKP: R3004.1 R3010.1 U3000.J7
DDR3-CS0N: RP3002.1 U3000.L2
DDR3-CS1N: RP3006.3 U3000.L1
DDR3-ODT0: RP3002.2 U3000.K1
DDR3-ODT1: RP3002.3 U3000.J1
DDR3-RASN: R3008.1 U3000.J3
DDR3-WEN: RP3006.4 U3000.L3
DDR3_A0: RP3004.6 U1000.D10 U3001.N3
DDR3_A1: RP3001.8 U1000.A8 U3001.P7
DDR3_A2: RP3003.8 U1000.D11 U3001.P3
DDR3_A3: RP3004.7 U1000.C9 U3001.N2
DDR3_A4: RP3001.7 U1000.B8 U3001.P8
DDR3_A5: RP3004.5 U1000.B9 U3001.P2
DDR3_A6: RP3000.5 U1000.A9 U3001.R8
DDR3_A7: RP3003.6 U1000.C11 U3001.R2
DDR3_A8: RP3000.7 U1000.A10 U3001.T8
DDR3_A9: RP3003.7 U1000.B11 U3001.R3
DDR3_A10: RP3005.8 U1000.B5 U3001.L7
DDR3_A11: RP3000.6 U1000.B10 U3001.R7
DDR3_A12: RP3005.6 U1000.A7 U3001.N7
DDR3_A13: RP3003.5 U1000.A12 U3001.T3
DDR3_A14: RP3000.8 U1000.A11 U3001.T7
DDR3_A15: RP3004.8 U1000.B6 U3001.M7
DDR3_BA0: RP3005.5 U1000.D8 U3001.M2
DDR3_BA1: RP3001.6 U1000.B7 U3001.N8
DDR3_BA2: RP3005.7 U1000.C8 U3001.M3
DDR3_CASN: RP3006.7 U1000.C6 U3001.K3
DDR3_CKE: RP3006.8 U1000.A4 U3001.J9 U3001.K9
DDR3_CLKN: R3009.2 U1000.D5 U3001.K7
DDR3_CLKP: R3010.2 U1000.D4 U3001.J7
DDR3_CS0N: RP3002.8 U1000.A5 U3001.L2
DDR3_CS1N: RP3006.6 U1000.E7 U3001.L1
DDR3_ODT0: RP3002.7 U1000.B4 U3001.K1
DDR3_ODT1: RP3002.6 U1000.D6 U3001.J1
DDR3_RASN: R3008.2 U1000.D7 U3001.J3
DDR3_RST: C3000.2 U1000.C4 U3000.T2 U3001.T2
DDR3_WEN: RP3006.5 U1000.A6 U3001.L3
DDR_D0: U1000.K4 U3000.E3
DDR_D1: U1000.J4 U3000.G2
DDR_D2: U1000.P4 U3000.H8
DDR_D3: U1000.N4 U3000.F8
DDR_D4: U1000.J3 U3000.F2
DDR_D5: U1000.K3 U3000.H3
DDR_D6: U1000.M4 U3000.H7
DDR_D7: U1000.P3 U3000.F7
DDR_D8: U1000.D2 U3001.A3
DDR_D9: U1000.D1 U3001.C3
DDR_D10: U3001.B8
DDR_D11: U3001.C8
DDR_D12: U1000.G1 U3001.A7
DDR_D13: U1000.E1 U3001.D7
DDR_D14: U1000.C1 U3001.C2
DDR_D15: U1000.C2 U3001.A2
DDR_D16: U1000.K1 U3000.C3
DDR_D17: U1000.K2 U3000.A3
DDR_D18: U1000.J1 U3000.C2
DDR_D19: U1000.J2 U3000.A2
DDR_D20: U1000.P2 U3000.A7
DDR_D21: U1000.L1 U3000.D7
DDR_D22: U1000.M1 U3000.C8
DDR_D23: U1000.P1 U3000.B8
DDR_D24: U1000.A2 U3001.F2
DDR_D25: U1000.A3 U3001.G2
DDR_D26: U1000.G4 U3001.F8
DDR_D27: U1000.F4 U3001.F7
DDR_D28: U3001.H8
DDR_D29: U1000.G3 U3001.H7
DDR_D30: U1000.B1 U3001.E3
DDR_D31: U1000.B2 U3001.H3
DDR_DM0: U1000.N3 U3000.E7
DDR_DM1: U1000.E2 U3001.D3
DDR_DM2: U1000.M2 U3000.D3
DDR_DM3: U1000.B3 U3001.E7
DDR_DQS0N: U1000.L3 U3000.G3
DDR_DQS0P: U1000.L4 U3000.F3
DDR_DQS1N: U1000.F1 U3001.B7
DDR_DQS1P: U1000.F2 U3001.C7
DDR_DQS2N: U1000.N1 U3000.B7
DDR_DQS2P: U1000.N2 U3000.C7
DDR_DQS3N: U1000.E3 U3001.G3
DDR_DQS3P: U1000.D3 U3001.F3
EMMC_D0/FLASH_D0: Q1301.3 U1000.W2
FSPI_D0/FLASH_ALE: Q1300.3 U1000.T2
I2C1_SCL: R1602.1 R1610.1
I2C1_SDA: R1601.1 R1609.1
MASKROM: R1304.1 R1305.1
MIPI_CSI_RX0_AVDD_0V8: C1605.1 R1608.2 U1000.T15
MIPI_CSI_RX0_AVDD_1V8: C1604.1 R1607.2 U1000.T16
MIPI_CSI_RX1_AVDD_0V8: C1603.1 R1606.2 U1000.R15
MIPI_CSI_RX1_AVDD_1V8: C1602.1 R1605.2 U1000.R16
MIPI_DSI_TX_AVDD_0V8: C1700.1 R1700.2 U1000.E18
MIPI_DSI_TX_AVDD_1V8: C1701.1 R1701.2 U1000.G15
PLL_AVDD_0V8: C1102.1 C1109.1 R1102.1 U1000.P11
PLL_AVDD_1V8: C1106.1 C1110.1 R1110.1 U1000.R11
PMUIO0_VDD: C1105.1 R1108.1 U1000.R9
PMUIO1_VDD: C1108.1 R1109.2 R1112.1 U1000.R8
PMUIO_VDD_0V8: C1104.1 R1103.1 U1000.P10
PMUIO_VDD_1V8: C1107.1 R1111.1 U1000.R10
RESET: R1105.2 R1106.2
TSADC_SHUT: R1106.1 U1000.Y5
USB_AVDD_0V8: C1402.1 R1404.2 U1000.R6
USB_AVDD_1V8: C1401.1 R1403.2 U1000.R7
USB_AVDD_3V3: C1400.1 R1402.2 U1000.T7
VREF_DDR: R3012.2 U1000.M6
VREFCA_DDR: C3015.1 C3016.2 C3017.1 C3018.1 C3019.1 R3006.2 R3007.1 R3011.1 U3000.M8 U3001.M8
VREFDQ_DDR: C3030.1 C3031.1 C3032.2 R3011.2 R3012.1 U3000.H1 U3001.H1
N17035290: C1100.1 R1100.2 Y1100.3
N17035293: R1100.1 U1000.Y9
N17035310: C1101.2 U1000.AA9 Y1100.1
N17150119: C3001.1 R3004.2 R3005.2
N18753015: R1104.1 U1000.T8
N18753035: C1103.2 R1105.1 U1000.W7
N18802573: Q1300.1 Q1301.1 R1305.2 SW1300.2 SW1300.3
N18802720: R1306.2 SW1300.1 SW1300.4 SW1300.5
N19764671: R1109.1 U1000.Y8
N19765264: R1200.1 U1000.E5
N19768544: R1401.1 U1000.U5
N20130364: R1400.1 U1000.U6
N22105127: R3000.1 U3000.L8
N22105139: R3001.1 U3001.L8
N22105469: R3002.1 U3000.L9
N22105497: R3003.1 U3001.L9

Pads without a net: R1112 2; R1306 1; RP3001 4 5; RP3002 4 5; U1000 A13 A15 A16 A18 A19 A20 AA2 AA3 AA4 AA6 AA7 AA12 AA13 AA15 AA16 AA18 AA19 AA20 B13 B14 B15 B16 B17 B18 B19 B20 B21 C13 C14 C15 C16 C17 C18 C19 C20 C21 D13 D14 D15 D16 D17 D19 D20 D21 E13 E17 E19 E20 F19 F20 F21 G18 G19 G20 G21 H01 H02 H03 H04 H05 H06 H16 H17 H18 H19 H20 J17 J18 J19 J20 J21 K16 K17 K18 K19 K20 K21 L17 L19 L20 M17 M18 M19 M20 M21 N17 N18 N19 N20 N21 P17 P19 P20 R2 R3 R4 R17 R18 R19 R20 R21 T1 T3 T4 T11 T18 T19 T20 T21 U2 U3 U4 U7 U9 U11 U12 U13 U15 U16 U18 U19 U20 V1 V2 V3 V4 V5 V6 V7 V9 V11 V12 V13 V15 V16 V18 V19 V20 V21 W1 W3 W4 W5 W6 W8 W10 W11 W12 W13 W15 W16 W17 W18 W19 W20 W21 Y1 Y2 Y3 Y4 Y6 Y7 Y10 Y11 Y12 Y13 Y14 Y15 Y16 Y17 Y18 Y19 Y20 Y21

## Via types
v1: diameter 0.4, hole 0.2, TOP to BOTTOM, 407 vias

## Routing (per net, layer and track width the routed paths; a pad name or vN(x,y) marks a point on that pad's centre or on a via; arc(x,y) is an arc through that point)
GND: length 439.9
  TOP w0.102: Y1100.2 40.86,88.53 40.23,87.89 40.23,87.79 40.08,87.65 40.08,84.63 40.28,84.43 41.76,84.43 42.01,84.18 42.01,81.69 41.76,81.43 v1(41.76,80.21) 41.76,78.64 42.06,78.33 42.06,76.1 41.55,75.59 v1(41.55,74.52) 41.49,74.56 U1000.AA10 41.49,73.75 41.82,73.42 v1(41.82,70.99) 41.82,70.98 U1000.T9 ; v1(72.44,82.4) 72.09,82.4 71.48,81.79 71.48,77.93 69.34,75.79 57.15,75.79 56.64,75.29 v1(56.64,75.08) 56.64,74.4 55.6,73.36 54.91,73.36 53.64,72.09 v1(51.87,72.09) ; v1(44.2,78.64) 44.15,78.89 44.15,81.77 44.91,82.53 44.91,86.72 45.67,87.48 45.67,87.99 46.02,88.34 46.02,89.05 ; v1(46.99,82.96) 46.89,83.06 46.89,87.02 47.4,87.53 47.4,88.9 50.75,92.25 58.22,92.25 61.42,89.05 61.42,88.85 61.26,88.7 57.3,88.7 56.49,89.51 52.93,89.51 49.68,86.26 49.68,78.82 v1(49.49,78.37) ; v1(45.93,78.66) 45.93,78.91 46.39,79.37 46.39,87.39 46.89,87.88 46.89,91.6 46.43,91.8 ; 58.88,82.75 58.88,83.01 58.78,83.11 58.47,83.11 58.37,83.01 58.37,82.7 58.27,82.6 58.12,82.6 58.01,82.7 58.01,83.01 57.91,83.11 57.76,83.11 57.66,83.01 57.66,82.7 57.56,82.6 57.35,82.6 57.25,82.7 57.25,83.01 57.15,83.11 57,83.11 56.9,83.01 56.9,82.7 56.79,82.6 56.64,82.6 56.54,82.7 56.54,83.01 56.44,83.11 56.29,83.11 56.18,83.01 56.18,82.7 56.08,82.6 55.83,82.6 55.68,82.45 ; 50.93,71.39 50.76,71.22 49.07,71.22 v1(48.21,70.36) ; 50.93,71.39 v1(50.9,71.37) ; 50.93,71.39 51.05,71.48 v1(52.35,71.48) ; v1(47.67,74.24) 47.67,75.22 50.66,78.21 50.66,85.89 52.61,87.84 53.69,87.84 ; U1000.M7 43.44,68.06 ; C1101.1 44.15,90.02 44.15,87.81 Y1100.4 43.16,82.87 42.94,82.64 42.94,75.52 v1(42.47,75.05) 42.47,72.94 ; v1(34.02,74.24) 32.72,75.54 32.72,76.91 28.35,81.28 28.35,84.38 ; 45.09,65.77 45.07,65.79 ; U1000.K9 41.83,67.08 41.18,67.08 U1000.L11
  TOP w0.127: v1(43.77,69.04) 43.77,69.04 43.75,69.05 ; U1000.L2 46.37,67.09 45.72,67.09 v1(45.72,67.09) ; U1000.D12 40.19,62.86 ; v1(40.11,60.27) 39.87,60.58 39.87,61.24 U1000.B12 40.19,61.56 ; 40.19,62.21 U1000.C12 40.19,62.21 ; 45.06,69.68 45.06,69.7 ; U1000.L13 39.87,67.09 ; 39.87,67.09 U1000.L12 ; 39.87,67.09 U1000.K13
  TOP w0.2: U1000.P8 v1(43.12,69.69) U1000.P7 ; U1000.P8 43.12,69.04 43.44,68.71 U1000.N7 ; U1000.P8 v1(42.47,69.69) U1000.P9 U1000.N10 ; 44.42,64.49 U1000.F5 44.42,63.84 ; 44.42,64.49 45.07,65.14 45.39,65.46 45.09,65.77 ; 44.42,64.49 U1000.F6 ; U1000.N14 38.89,68.77 38.6,69.07 ; U1000.N14 U1000.M13 ; U1000.N14 v1(38.57,68.39) 39.87,67.09 U1000.K12 v1(39.93,66.52) ; U1000.K13 U1000.L14 ; U1000.K13 U1000.J12 ; U1000.K13 v1(40.52,67.74) ; U1000.K13 39.22,66.44 ; U1000.L14 v1(38.57,67.74) ; U1000.L14 U1000.M13 ; U1000.K5 v1(44.42,67.09) ; v1(44.42,67.09) v1(45.07,67.74) U1000.M5 44.74,68.06 44.42,68.39 v1(43.77,69.04) ; v1(44.42,67.09) U1000.L6 U1000.M7 ; 41.82,64.49 U1000.F10 ; 41.82,64.49 42.09,64.21 ; 41.82,64.49 41.49,64.81 U1000.G10 U1000.F11 U1000.E12 ; U1000.F10 U1000.E11 ; U1000.F10 U1000.E9 v1(42.47,63.19) ; U1000.F10 U1000.G11 ; U1000.E11 U1000.F12 ; U1000.E11 v1(40.52,63.19) v1(39.87,63.84) ; U1000.E11 v1(41.17,63.19) ; U1000.F12 v1(39.87,63.84) ; U1000.F12 40.19,64.16 U1000.G13 39.22,64.49 ; 38.6,69.07 U1000.P14 v1(38.57,69.69) U1000.R14 v1(38.57,70.34) U1000.T14 ; 38.6,69.07 38.52,68.99 37.97,68.99 37.92,69.04 ; 44.42,63.84 44.09,63.51 ; 44.42,63.84 U1000.F6 ; U1000.G5 44.42,65.13 v1(44.42,65.14) 44.09,64.81 ; U1000.H15 U1000.G16 v1(37.27,64.49) ; U1000.H15 U1000.J16 ; U1000.H15 U1000.J14 39.22,66.44 ; 43.44,68.06 v1(43.16,68.34) ; v1(43.16,68.34) U1000.M8 42.98,67.88 42.98,67.23 v1(43.12,67.09) 42.47,66.44 ; v1(43.16,68.34) 43.44,68.71 ; U1000.L12 U1000.M13 ; U1000.F6 43.77,64.49 ; 43.77,64.49 44.09,64.81 ; 43.77,64.49 U1000.F7 ; v1(43.77,63.19) 44.09,63.51 ; 44.09,63.51 U1000.E6 ; U1000.F9 42.1,64.21 42.09,64.21 ; U1000.F9 42.15,64.16 U1000.E8 ; U1000.F9 42.14,64.16 ; U1000.L5 v1(44.42,67.74) ; 42.09,64.21 42.14,64.16 ; U1000.C5 v1(44.42,61.89) ; U1000.A21 v1(34.02,60.59) ; U1000.N10 v1(41.71,68.45) U1000.M10 v1(41.2,68.4) ; U1000.N10 v1(41.2,68.4) ; U1000.N13 U1000.M14 ; U1000.W14 v1(39.22,72.29) ; 39.22,64.49 v1(39.87,63.84) ; 39.22,64.49 38.89,64.16 U1000.F14 v1(38.57,63.84) 38.24,64.16 U1000.F15 ; U1000.E4 v1(45.72,63.19) ; 45.07,65.79 U1000.J5 ; v1(45.72,64.49) U1000.F3 ; 37.92,69.04 U1000.N16 v1(37.92,68.39) U1000.M16 v1(37.27,67.74) U1000.L16 ; 37.92,69.04 U1000.P16 ; v1(41.2,68.4) U1000.N11 ; U1000.E8 v1(42.47,63.19) ; U1000.E8 v1(42.47,63.19) ; U1000.N5 44.74,68.71 44.42,69.04 ; 42.14,64.16 U1000.E10 ; 42.47,66.44 42.62,66.28 42.62,65.94 v1(42.47,65.79) ; 42.47,66.44 U1000.K9 ; U1000.M3 v1(45.72,68.39) ; U1000.R13 v1(39.87,70.34) U1000.R12 ; U1000.R1 47.83,70.01 v1(48.21,70.36) ; 41.49,70.66 U1000.T10 v1(41.82,70.99) U1000.T9 ; v1(47.67,74.24) U1000.AA1 ; 39.22,66.44 U1000.K14 ; U1000.C3 v1(46.37,61.89) ; U1000.C7 v1(43.12,62.53) ; 42.47,72.94 U1000.W9 ; v1(42.47,63.19) U1000.D9 v1(41.82,63.19) U1000.F8 ; 43.77,65.14 44.09,65.46 ; 43.77,65.14 U1000.H7 ; 43.77,65.14 U1000.G6 44.09,64.81 ; U1000.AA21 v1(34.02,74.24) ; U1000.F13 39.54,64.16 U1000.G12 40.19,64.81 40.52,64.49 ; U1000.G2 v1(47.02,64.49) ; U1000.T17 v1(36.62,70.99) ; U1000.D18 v1(35.97,62.54) ; U1000.V17 v1(36.62,72.29) ; U1000.T6 v1(43.77,70.34)
  TOP w0.203: 40.19,61.56 v1(39.87,61.88) 40.19,62.21 ; U1000.N6 44.42,69.04 ; U1000.G17 v1(37.27,64.49) ; v1(41.17,61.89) 41.25,61.97 U1000.C10 ; 44.74,69.36 45.06,69.68 ; U1000.F12 40.19,64.16 40.52,64.49 ; 40.19,62.86 v1(39.87,62.53) 40.19,62.21 ; 44.42,68.39 U1000.N5 ; U1000.K14 U1000.L13 U1000.M12 v1(40.52,67.74) U1000.L11 ; 40.52,64.49 41.17,65.14 U1000.H10 ; 40.52,64.49 U1000.E10 ; v1(44.42,65.14) 45.07,65.79 ; v1(40.52,63.19) U1000.D12 ; 43.12,69.04 U1000.P7 ; v1(56.15,50.01) 56.04,50.12 U3001.E1 ; 45.06,69.7 U1000.R5
  TOP w0.25: U1000.P7 43.75,69.05 ; U1000.J5 44.74,66.11 44.09,65.46
  TOP w0.254: v1(53.24,63.77) 53.64,64.17 U3000.B1 ; v1(61.93,50.31) 61.64,50.59 U3001.M1 ; v1(65.42,63.9) 65.11,63.9 U3000.T1 ; 43.77,63.84 U1000.F6 ; 43.77,63.84 U1000.E6 ; 43.77,63.84 43.45,64.16 U1000.F7 43.12,63.84 ; 45.07,65.14 v1(44.42,65.79) U1000.J6 44.74,66.76 U1000.K5 ; U1000.M5 44.09,67.41 U1000.L6 ; v1(64.21,49.79) 63.24,50.76 U3001.P1 ; v1(53.35,66.11) 53.64,65.82 U3000.B3 ; U3001.G9 57.64,57.38 57.23,57.79 ; U3001.P9 63.24,57.73 v1(63.26,57.89) ; U1000.F8 42.79,64.16 43.12,63.84 ; U3000.J2 59.24,65 v1(58.88,65.36) ; 55.62,69.35 v1(55.65,69.29) ; 55.62,69.35 U3000.E8 ; 55.62,69.35 55.24,69.72 U3000.D8 55.64,70 v1(55.65,70) ; U3001.B3 v1(53.29,52.89) ; U1000.N7 43.44,68.71 v1(43.77,69.04) ; U1000.P5 44.74,69.36 44.42,69.04 ; v1(61.68,71.51) 61.64,71.41 U3000.M9 ; 44.42,64.49 U1000.G6 ; 65.38,70.57 65.38,71.42 v1(65.84,71.88) ; v1(64.21,49.28) 64.84,49.92 U3001.T1 ; U1000.G10 41.17,65.14 ; U3000.B9 v1(53.64,71.48) ; U3001.D8 v1(55.64,56.94) U3001.E8 ; 57.23,57.79 56.84,57.39 U3001.F9 ; 57.23,57.79 v1(57.23,57.79) ; 43.12,63.84 U1000.E8 ; U3001.G1 56.72,50.01 v1(56.15,50.01) ; v1(58.88,52.13) 59.24,51.76 U3001.J2 ; U1000.M14 v1(38.57,67.74) ; v1(44.42,67.09) U1000.K6 U1000.J5 ; U1000.F3 46.04,64.16 U1000.E4 45.39,63.51 U1000.F5 ; U1000.A1 v1(47.85,60.45) ; v1(59.64,56.92) 59.26,56.54 U3001.J8 ; U3000.E1 56.04,64.18 v1(55.64,64.59) ; U3000.F9 v1(57.33,71.07) ; U3000.G1 v1(56.46,63.13) ; v1(52.83,71.48) U3000.A9 ; v1(44.42,65.14) 44.09,65.46
  TOP w0.3: U3000.E8 55.64,70 ; v1(41.17,63.19) 41.49,63.51 v1(41.82,63.19) ; C3031.2 56.56,61.19 v1(56.53,61.22) ; v1(58.88,70.21) 59.24,69.84 U3000.J8
  TOP w0.305: U3001.E2 56.04,51.74 v1(55.64,51.34) ; U3000.P9 v1(63.64,70.18) ; U3001.B9 53.24,57.74 v1(53.24,57.74) U3001.A9 52.84,57.35 v1(52.46,57.73) ; U3001.D1 55.24,50.94 v1(55.64,51.34) ; U3000.P1 63.64,63.77 63.64,63.06 63.34,62.76 v1(63.13,62.76) 62.42,62.76 61.64,63.53 U3000.M1 ; U3000.E2 55.66,64.59 v1(55.64,64.59) 55.24,64.19 U3000.D1 v1(54.84,63.77) ; U3000.G8 57.66,69.77 v1(58.04,69.39) ; U3000.T9 v1(65.24,70.17) ; U3000.G9 57.81,70.74 v1(57.81,71.07) ; U3001.B1 53.64,50.61 v1(53.79,50.46) ; R3003.2 61.73,61.07 v1(61.73,61.32) 61.77,61.35 63.67,61.35 64.03,60.99 R3001.2 ; U3001.G8 v1(57.24,56.94) ; v1(55.64,51.34) U3001.E1 ; U3001.M9 61.64,58.22 v1(61.62,58.22) ; v1(65.32,57.44) 65.01,57.44 U3001.T9
  TOP w0.4: 27.28,79.91 27.28,83.41 27.53,83.67 27.53,85.19 27.28,85.45 27.28,87.43
  TOP w0.508: U3000.T9 65.38,70.57
  POWER w0.4: 26.62,53.85 26.67,53.8
  POWER w0.406: 25.55,70.05 25.55,70
  BOTTOM w0.089: 40.02,59.93 40.11,60.02 v1(40.11,60.27) 39.69,60.69 39.69,61.71 v1(39.87,61.88)
  BOTTOM w0.102: v1(55.65,69.29) 55.58,69.22 53.95,69.22 53.31,68.58 50.52,68.58 50.06,69.04 v1(50.04,69.04) 49.78,68.78 46.11,68.78 v1(45.72,68.39) ; v1(43.77,63.19) 43.4,63.55 42.46,63.55 C1203.2 ; 33.26,74.24 v1(34.02,74.24) ; 35.31,62.99 35.33,62.97 35.51,62.97 ; 35.31,62.99 35.56,62.99 36.02,62.53 ; 35.31,62.99 34.42,62.99 34.02,62.59 v1(34.02,60.59) ; 48.42,70.82 48.88,71.27 50.75,71.27 50.85,71.37 v1(50.9,71.37) ; v1(44.42,68.39) 44.42,69.11 44.91,69.6 44.91,69.84 ; 32.36,77.26 36.62,73 v1(36.62,72.29) ; 69.29,74.57 69.29,76.71 68.83,77.17 ; 58.88,82.75 58.88,84.39 ; v1(45.31,81.99) 45.31,81.53 C1103.1 ; v1(72.44,82.4) 72.49,82.45 ; v1(69.95,77.42) 69.55,77.83
  BOTTOM w0.127: v1(39.87,62.53) v1(39.87,61.88) ; 40.02,59.93 v1(40.02,58.46)
  BOTTOM w0.203: 45.95,77.06 45.95,78.64 v1(45.93,78.66) ; 34.47,77.16 C1605.2 34.47,77.93 34.34,78.05 ; 36.58,70.66 36.62,70.7 v1(36.62,70.99) ; v1(38.57,70.34) 38.68,70.45 C1603.2 38.68,70.69 ; 37.19,69.88 37.19,69.72 38.01,68.89 C1016.2
  BOTTOM w0.254: 59.79,85.24 59.79,82.45 59.44,82.09 59.44,77.93 60.35,77.01 66.6,77.01 68.78,74.83
  BOTTOM w0.3: v1(65.77,65.38) 65.77,65.79 65.8,65.79 C3000.1 ; v1(56.44,57.76) 56.29,57.91 56.29,58.46 C3003.2 56.55,58.47 v1(57.23,57.79) ; v1(58.88,65.36) 58.58,65.07 C3014.2 ; C3004.2 66.42,62.22 v1(66.69,61.95) ; 69.65,72.34 66.09,75.9 59.89,75.9 57.91,77.88 57.91,84.94 56.64,86.21
  BOTTOM w0.305: v1(56.53,66.46) 56.08,66.46 55.73,66.81 C3007.2 ; v1(58.18,67.32) 58.18,67.76 C3011.2 ; C3023.2 47.66,60.65 v1(47.85,60.45) ; v1(55.64,51.34) 55.64,50.76 C3025.2 ; 44.82,65.38 44.66,65.38 v1(44.42,65.14) ; 44.82,65.38 C1206.2 ; 44.82,65.38 v1(44.42,65.79) ; v1(64.91,66.27) 64.41,66.27 C3006.2 ; v1(59.58,45.79) C3013.2 ; v1(60.85,68.21) 60.85,68.52 C3001.2 ; v1(52.83,71.48) 52.88,71.43 C3012.2 ; v1(65.32,57.44) C3005.2 ; v1(56.79,54.15) 56.79,53.75 C3026.2 ; C3010.2 57.16,56.86 v1(57.24,56.94) ; C3030.2 56.72,48.87 v1(56.72,48.46) ; v1(63.26,57.89) 62.96,57.89 C3027.2 ; v1(48.21,70.36) 48.42,70.57 48.42,70.82 ; v1(53.24,57.74) C3024.2
  BOTTOM w0.381: v1(51.64,51.35) 51.51,51.22 51.51,50.68 ; v1(61.68,71.51) 61.49,71.71 C3017.2 ; v1(58.32,71.27) 57.86,71.73 C3002.2 ; v1(51.13,51.35) 51.13,50.97 51.41,50.68 51.51,50.68 ; 51.51,50.68 C3020.2 ; C3008.2 60.08,71.12 v1(60.08,71.41) ; v1(54.84,63.77) 54.84,63.29 55.14,62.99 C3009.2
  vias: v1(40.08,56.34) v1(40.08,54.15) v1(40.03,52.53) v1(40.03,50.7) v1(40.64,49.02) v1(42.47,47.24) v1(44.4,45.26) v1(46.43,43.33) v1(48.51,41.86) v1(49.94,73.91) v1(50.9,41.86) v1(52.37,80.01) v1(53.19,41.86) v1(53.34,74.37) v1(54.05,75.95) v1(54.36,71.93) v1(54.86,87.83) v1(55.42,72.54) v1(55.73,41.86) v1(57.96,41.86) v1(60.25,81.43) v1(60.25,41.91) v1(60.4,74.93) v1(61.42,74.93) v1(61.72,42.77) v1(62.43,74.93) v1(62.79,78.38) v1(63.02,82.17) v1(63.35,71.88) v1(63.4,74.93) v1(63.55,42.62) v1(63.6,80.52) v1(64.36,74.93) v1(64.47,83.97) v1(64.52,72.59) v1(64.62,80.52) v1(65.23,74.93) v1(65.58,82.35) v1(66.29,44.91) v1(66.4,69.65) v1(66.62,78.44) v1(67.51,81.48) v1(67.56,80.47) v1(68.07,46.58) v1(68.38,68.48) v1(69.55,64.01) v1(69.7,79.86) v1(69.7,66.6) v1(69.85,62.03) v1(69.85,48.41) v1(69.95,59.28) v1(69.95,56.85) v1(69.99,50.65) v1(70,53.7) v1(71.83,85.8) v1(72.34,84.99) v1(74.63,72.39)
VCC0V8_PMU: length 1.7
  BOTTOM w0.3: R1102.2 42.23,83.16 41.61,83.16
VCC1V8_PMU: length 2.2
  BOTTOM w0.3: R1111.2 R1110.2
  BOTTOM w0.35: 40.32,82.41 40.03,82.45 40.03,82.96
VCC_0V8: length 3
  BOTTOM w0.3: R1606.1 R1608.1
  BOTTOM w0.35: R1608.1 33.43,82.75
VCC_1V8: length 17.8
  BOTTOM w0.4: R1300.1 52.85,72.69 53.85,72.69 54.36,73.2 58.01,73.2 58.62,73.81 58.62,75.69 56.95,77.37 56.95,84.48
VCC_3V3: length 17.7
  BOTTOM w0.4: 56.39,84.18 56.39,77.11 58.06,75.44 58.06,74.07 57.81,73.81 52.85,73.81 R1301.1 ; 37.08,83.21 37.19,83.11
  BOTTOM w0.508: 37.08,83.72 37.19,83.62 R1800.1
  vias: v1(62.13,86.06) v1(72.59,71.58)
VCC_DDR: length 66.2
  TOP w0.127: v1(58.88,64.54) 58.91,64.57 59.64,64.57 U3000.K2 ; v1(60.4,49.79) 60.46,49.92 60.46,51.13 60.04,51.55 U3001.K2
  TOP w0.2: U1000.G8 v1(42.47,64.81) U1000.G9 ; U1000.J7 43.44,66.11 U1000.H8 v1(43.12,65.14) U1000.G7 ; U1000.K7 v1(43.12,66.44) ; 43.44,66.76 v1(43.77,67.09) U1000.L7
  TOP w0.203: U1000.G8 43.12,64.49 v1(43.12,64.49)
  TOP w0.254: U3001.N1 62.44,50.18 62.07,49.8 v1(61.93,49.8) ; U3000.H2 58.44,64.97 v1(58.88,64.54) ; v1(63.13,63.27) 63.13,63.48 U3000.N1 ; U3000.K8 60.06,69.77 v1(60.45,70.16) ; v1(58.88,71) 58.44,70.57 U3000.H9 ; U3000.G7 57.64,68.97 v1(57.24,68.57) ; v1(43.12,66.44) U1000.J7 v1(43.12,65.79) ; U3000.N9 62.81,70.94 v1(62.81,71) ; U3001.R9 64.04,57.69 64.94,58.59 v1(65.1,58.59) ; v1(43.12,64.49) U1000.G7
  TOP w0.3: v1(55.19,57.76) v1(55.7,57.76)
  TOP w0.305: U3000.C9 54.44,71.05 v1(54.43,71.06) ; v1(55.19,57.76) U3001.D9 ; v1(56.46,50.49) 56.84,50.87 U3001.F1 ; U3001.R1 64.04,50.67 v1(64.21,50.5) ; v1(57.1,55.13) 57.64,55.67 U3001.G7 ; v1(65.04,63.14) 64.83,63.34 64.83,63.38 U3000.R1 ; U3001.H2 58.46,51.74 v1(58.88,51.32) ; U3001.E9 56.04,57.39 v1(55.7,57.76) ; v1(53.23,56.9) 53.21,56.9 U3001.A8 ; U3000.F1 56.84,64.17 v1(56.44,63.77) ; 53.64,51.74 U3001.C1 v1(54.84,51.34) 55.24,51.74 U3001.D2 ; 53.64,51.74 U3001.B2 ; 53.64,51.74 v1(53.24,51.34) U3001.A1 v1(52.44,51.34) ; v1(57.23,58.9) 58.44,57.69 U3001.H9 ; v1(51.97,70.05) 52.2,69.82 52.79,69.82 U3000.A8 ; U3001.N9 62.44,58.15 63.13,58.84 v1(63.2,58.84) ; v1(54.43,57.76) 54.44,57.75 U3001.C9 ; U3001.K8 60.02,56.54 v1(59.64,56.15) ; U3000.D9 v1(55.65,71.17) U3000.E9 ; U3000.A1 53.04,64.36 v1(53.24,64.57) 53.49,64.82 53.49,64.82 U3000.B2 ; U3000.C1 54.63,64.36 v1(54.84,64.57) 55.03,64.76 U3000.D2 ; v1(63.64,71) U3000.R9
  TOP w0.381: v1(55.65,71.17) v1(55.65,71.68)
  TOP w0.5: R3006.1 66.06,74.45 66.5,74.02 66.5,71.58 v1(65.89,70.97)
  BOTTOM w0.203: C3016.1 62.08,57.95 62.08,58.62 62.48,59.03 62.59,59.03 C3027.1
  BOTTOM w0.3: 43.77,66.42 v1(43.77,67.09)
  BOTTOM w0.305: C3027.1 62.94,59.1 v1(63.2,58.84) ; v1(65.04,63.14) 65.32,62.85 C3004.1 ; 54.64,71.27 v1(54.43,71.06) ; C3026.1 55.58,53.54 v1(55.22,53.9) ; C3014.1 58.51,64.17 v1(58.88,64.54) ; C3013.1 61.1,47.32 v1(61.23,47.32) ; v1(60.45,70.16) 60.98,70.69 C3008.1 ; v1(54.43,57.76) 54.43,58.03 C3003.1 ; C3007.1 54.5,66.81 v1(54.18,66.49) ; v1(53.23,56.9) C3024.1 ; C3021.1 63.64,70.89 v1(63.64,71) ; C3003.1 54.88,58.08 v1(55.19,57.76) ; C3003.1 54.99,58.47 v1(55.7,57.76) ; v1(62.91,66.21) C3006.1 ; C3011.1 57.24,68.12 v1(57.24,68.57) ; C3023.1 47.75,59.44 v1(47.75,59.33) ; v1(65.1,58.59) C3005.1 ; C3032.1 58.98,71.57 ; v1(51.97,70.05) C3012.1 ; v1(48.97,70.36) 49.32,70.82 ; v1(57.1,55.13) C3010.1
  BOTTOM w0.381: v1(62.81,71) 62.81,70.27 ; 58.98,71.57 58.88,71.47 v1(58.88,71) ; v1(54.84,64.57) 55.52,63.89 C3009.1 55.83,63.77 v1(56.44,63.77) ; v1(53.24,51.34) 53.24,50.98 C3020.1 52.44,51.11 v1(52.44,51.34)
  BOTTOM w0.508: v1(55.65,71.68) 55.65,71.34 55.73,71.25 ; 55.7,71.25 v1(55.65,71.17)
  BOTTOM w0.635: C3002.1 55.73,71.25 54.65,71.25
  vias: v1(66.27,50.65)
VCC_DOVDD: length 4.1
  TOP w0.254: R1610.2 27.43,78.64 27.79,78.99 ; 27.79,79.81 29.36,79.81 30.33,78.84 R1609.2
VCCIO3_VDD: length 1.2
  TOP w0.2: v1(38.57,63.19) U1000.E14
  BOTTOM w0.191: v1(38.57,63.19) 39.04,63.66 39.04,63.7
VCCIO4_VDD: length 2.2
  TOP w0.127: v1(37.92,69.69) 37.92,69.69
  TOP w0.2: 37.92,69.69 U1000.P15 ; R1602.2 R1601.2
  TOP w0.25: 28.4,78.89 R1602.2
  BOTTOM w0.203: v1(37.92,69.69) 37.83,69.77 37.64,69.88
VCCIO5_VDD: length 2
  TOP w0.254: U1000.J15 U1000.K15 v1(38.57,67.09)
  BOTTOM w0.203: 38.36,66.87 38.38,66.87
  BOTTOM w0.305: 37.74,66.87 38.36,66.87 v1(38.57,67.09)
VCCIO6_VDD: length 1.4
  TOP w0.2: U1000.M15 v1(37.92,67.74)
  BOTTOM w0.305: 38.03,67.92 38.03,67.85 v1(37.92,67.74)
  BOTTOM w0.381: 33.22,68.58 v1(33.73,68.07)
VCCIO7_VDD: length 13.3
  TOP w0.2: v1(40.52,70.34) U1000.T12
  BOTTOM w0.2: R1800.2 37.69,80.61 37.69,75.84 39.93,73.61 39.93,70.93 v1(40.52,70.34)
  BOTTOM w0.3: R1800.2 37.19,81.13 37.69,81.64
VCCIO_FLASH: length 4.4
  TOP w0.127: 44.42,69.68 v1(44.42,69.69)
  TOP w0.2: U1000.P6 44.42,69.68
  BOTTOM w0.203: v1(44.42,69.69) 44.42,69.66 44.22,69.47
  BOTTOM w0.5: v1(49.53,71.68) 49.78,71.93 50.63,71.93 R1300.2 51.24,73.17 v1(51.05,73.36) 51.24,73.54 R1301.2
  vias: v1(69.49,79.35) v1(72.39,77.17) v1(79.3,76.86)
VCCIO_SD: length 16
  TOP w0.2: U1000.T13 v1(39.22,70.34)
  BOTTOM w0.2: 37.08,76.12 C1300.1 37.08,75.84 39.62,73.3 39.62,70.74 v1(39.22,70.34)
  BOTTOM w0.3: 36.42,84.28 36.42,76.53 36.83,76.12 37.08,76.12
VCCIO_VDD_1V8: length 0.5
  TOP w0.2: v1(38.57,65.14) U1000.H14
VDD_ARM: length 6.2
  TOP w0.2: v1(40.44,68.45) 40.44,68.47 U1000.N12 v1(39.87,69.04) U1000.P13 v1(39.9,69.65) U1000.P12
  TOP w0.203: v1(39.22,69.69) U1000.P13 ; v1(39.87,68.39) U1000.N12 ; U1000.P12 v1(39.87,69.04)
  BOTTOM w0.254: v1(39.87,68.39) 39.88,68.4 40.74,68.4
  BOTTOM w0.3: v1(39.9,69.65) 39.49,69.69 C1017.1 ; C1016.1 39.39,68.89
  BOTTOM w0.305: 39.39,68.89 39.74,68.89 39.87,69.01 v1(39.87,68.39)
VDD_LOGIC: length 15.6
  TOP w0.2: v1(38.57,64.49) v1(39.22,65.14) U1000.H13 39.38,65.62 39.38,65.95 U1000.J13 ; v1(41.82,65.14) U1000.H9 v1(41.82,65.79) U1000.J9 ; U1000.M11 v1(41.25,67.64) U1000.L10
  POWER w0.08: 42.14,64.47 42.14,62.94 42.06,62.86 40.86,62.86 40.19,62.2 40.19,61.52
  POWER w0.102: v1(41.82,65.14) 42.01,64.94 42.01,64.6 42.14,64.47 ; 40.19,61.52 39.37,60.69
  BOTTOM w0.102: v1(39.22,65.14) 39.21,65.13
  BOTTOM w0.203: 38.99,64.95 39.17,65.13 39.21,65.13 39.21,65.13 ; 38.99,64.95 39.07,64.84 ; 38.99,64.95 38.59,64.55 38.59,64.49 v1(38.57,64.49)
  BOTTOM w0.3: C1012.1 41.5,64.82 v1(41.82,65.14) ; v1(38.57,64.49) 38.17,64.49 C1011.1 ; 41.94,65.43 41.82,65.43 v1(41.82,65.79) ; v1(41.25,67.64) 41.6,67.31 C1010.1
  BOTTOM w0.381: 41.5,64.54 41.94,64.97 41.94,65.43
VDD_NPU_VEPU: length 43.2
  TOP w0.102: 41.17,65.79 v1(41.15,65.79) ; v1(41.12,66.42) 41.17,66.44
  TOP w0.2: U1000.J11 v1(41.12,66.42) ; U1000.J11 v1(40.52,66.44) U1000.K11 41.17,66.44 ; U1000.J11 41.17,66.44 ; U1000.J11 41.17,65.79 ; U1000.J11 v1(40.52,65.79) ; v1(41.12,66.42) U1000.J10 v1(41.15,65.79) ; v1(41.12,66.42) U1000.K10 41.17,66.44 ; v1(42.47,67.25) 42.31,67.25 U1000.L9 42.2,67.47 ; 42.2,67.47 v1(42.47,67.74) U1000.M9 ; 42.2,67.47 41.97,67.69 v1(41.97,67.75) 41.97,67.89 U1000.M9 ; U1000.H11 v1(41.15,65.79) ; U1000.H11 v1(40.52,65.79) ; U1000.H11 v1(41.15,65.79) ; v1(42.47,68.39) U1000.N8 42.54,68.96 v1(42.39,68.96) U1000.N9 v1(42.47,68.39) ; v1(42.47,68.39) U1000.M9 ; v1(40.52,65.79) U1000.H12 v1(39.87,65.14)
  TOP w0.254: v1(39.87,65.79) U1000.H12
  POWER w0.102: 32.92,47.9 32.82,48.01 32.82,62.28 35.41,64.87 37.8,64.87 38.43,65.51 38.94,65.51 39.01,65.58 39.66,65.58 v1(39.87,65.79)
  POWER w0.35: v1(42.39,68.96) v1(42.47,67.25)
  POWER w0.381: v1(41.15,65.79) 40.27,65.79 39.87,65.38 ; v1(39.87,65.14) 39.87,65.38 ; 39.87,65.38 v1(39.87,65.79)
  BOTTOM w0.15: C1006.1 39.49,66.37
  BOTTOM w0.203: 39.44,66.55 39.44,66.7 39.8,67.06 39.8,67.26 39.82,67.28
  BOTTOM w0.3: 39.73,65.63 C1001.1 39.73,64.84 ; 39.73,65.63 39.44,66.55 ; 39.73,65.63 40.37,65.63 v1(40.52,65.79) ; 39.87,65.84 v1(39.87,65.79)
ADC_AVDD_1V8: length 4
  TOP w0.2: U1000.E16 v1(37.27,63.19)
  BOTTOM w0.152: 36.83,63.65 36.93,63.5 36.93,63.42 37.17,63.19 v1(37.27,63.19)
  BOTTOM w0.2: 34.06,63.6 34.22,63.75 36.73,63.75 36.83,63.65
DDR3-A0: length 15.2
  TOP w0.102: v1(62.81,65.36) U3000.N3
  BOTTOM w0.102: v1(62.81,65.36) 63.26,64.92 63.26,64.35 63.89,63.71 63.89,62.57 66.75,59.71 66.75,57.22 66.18,56.65 66.18,55.25 65.8,54.87 65.61,54.87 65.45,55.03 65.29,55.03 65.13,54.87 65.13,54.68 65.29,54.52 65.29,54.36 65.13,54.2 65.01,54.2 RP3004.3
DDR3-A1: length 10.5
  TOP w0.102: RP3001.1 66.62,61.32 67.32,62.01 67.32,65.81 65.74,67.39 64.26,67.39 63.24,68.41 U3000.P7
DDR3-A2: length 11.7
  TOP w0.102: v1(63.64,65.36) U3000.P3
  BOTTOM w0.102: RP3003.1 67.01,56.12 67.01,56.39 67.51,56.9 67.51,60.09 64.66,62.95 64.66,64.35 v1(63.64,65.36)
DDR3-A3: length 13.4
  TOP w0.102: v1(62.81,64.6) U3000.N2
  BOTTOM w0.102: RP3004.2 64.72,54.63 64.72,55.06 65.07,55.41 65.54,55.41 65.8,55.66 65.8,56.81 66.37,57.38 66.37,59.52 63.51,62.38 63.51,63.58 62.81,64.28 v1(62.81,64.6)
DDR3-A4: length 11.6
  TOP w0.102: RP3001.2 66.12,62.01 66.94,62.84 66.94,65.62 65.54,67.01 64.08,67.01 62.81,68.28 62.81,69.34 U3000.P8
DDR3-A5: length 14
  TOP w0.102: v1(63.64,64.54) 63.24,64.93 U3000.P2
  BOTTOM w0.102: v1(63.64,64.54) 63.88,64.54 64.27,64.14 64.27,62.76 67.13,59.9 67.13,57.06 66.56,56.49 66.56,55.03 RP3004.4
DDR3-A6: length 11.3
  TOP w0.102: RP3000.4 67.58,61.73 67.7,61.86 67.7,66 65.93,67.77 64.4,67.77 63.64,68.54 63.64,69.37 U3000.R8
DDR3-A7: length 11.3
  TOP w0.102: U3000.R2 64.48,64.54 v1(65.42,64.54)
  BOTTOM w0.102: RP3003.3 68.02,56.12 68.02,56.39 68.28,56.65 68.28,61.68 v1(65.42,64.54)
DDR3-A8: length 11.3
  TOP w0.102: U3000.T8 64.47,69.39 64.47,68.73 64.66,68.54 66.31,68.54 68.47,66.38 68.47,61.76 68.59,61.63 RP3000.2
DDR3-A9: length 11.9
  TOP w0.102: v1(64.47,65.36) 64.06,65.77 U3000.R3
  BOTTOM w0.102: RP3003.2 67.51,56.12 67.51,56.39 67.89,56.78 67.89,61.47 65.89,63.47 65.27,63.47 65.04,63.71 65.04,64.79 v1(64.47,65.36)
DDR3-A10: length 15.3
  TOP w0.102: U3000.L7 61.26,68.56 61.26,67.19 61.37,67.08 61.5,67.08 v1(61.67,67.25)
  BOTTOM w0.102: v1(61.67,67.25) 61.29,66.87 61.29,60.81 61.48,60.62 62.34,60.62 62.43,60.52 62.43,60.33 62.34,60.24 61.89,60.24 61.8,60.14 61.8,59.82 61.89,59.73 63.1,59.73 63.58,59.25 63.58,58.08 63.67,57.98 63.67,57.6 RP3005.1
DDR3-A11: length 10.3
  TOP w0.102: U3000.R7 64.04,68.6 64.49,68.16 66.12,68.16 68.08,66.19 RP3000.3
DDR3-A12: length 13.4
  TOP w0.102: v1(62.43,68.54) 62.44,68.55 U3000.N7
  BOTTOM w0.102: RP3005.3 64.47,56.96 64.47,58.11 64.34,58.24 64.34,59.84 61.99,62.19 61.99,63.83 62.05,63.89 62.05,67.44 62.43,67.83 v1(62.43,68.54)
DDR3-A13: length 11.4
  TOP w0.102: v1(65.23,65.36) 64.84,65.75 U3000.T3
  BOTTOM w0.102: v1(65.23,65.36) 68.66,61.93 68.66,56.43 68.47,56.24 RP3003.4
DDR3-A14: length 10.4
  TOP w0.102: RP3000.1 69.1,61.73 68.85,61.98 68.85,66.57 66.44,68.97 U3000.T7
DDR3-A15: length 20.8
  TOP w0.102: v1(62.43,66.87) 62.53,66.97 63.05,66.97 63.13,66.89 63.13,66.68 63.04,66.59 62.72,66.59 62.34,66.21 62.15,66.21 62.05,66.3 62.05,67.09 62.31,67.35 62.31,67.63 62.21,67.73 61.77,67.73 61.64,67.85 U3000.M7
  BOTTOM w0.102: RP3004.1 64.34,54.96 64.34,55.27 64.86,55.79 65.32,55.79 65.42,55.89 65.42,56.93 65.99,57.51 65.99,59.33 65.84,59.47 65.23,59.47 65.1,59.6 65.1,60.22 62.75,62.57 62.75,63.83 62.43,64.14 v1(62.43,66.87)
DDR3-BA0: length 10
  TOP w0.102: v1(62.37,63.57) 62.05,63.89 62.05,64.56 U3000.M2
  BOTTOM w0.102: v1(62.37,63.57) 62.37,62.38 64.72,60.03 64.72,58.39 64.85,58.27 64.85,57.28 64.97,57.16 64.97,56.75 RP3005.4
DDR3-BA1: length 11.9
  TOP w0.102: RP3001.3 65.61,62.14 66.56,63.09 66.56,65.43 65.3,66.68 63.89,66.68 62.46,68.11 62.27,68.11 62.05,68.33 62.05,69.38 U3000.N8
DDR3-BA2: length 11
  TOP w0.102: v1(61.67,66.17) 61.66,66.16 61.64,66.14 U3000.M3
  BOTTOM w0.102: RP3005.2 64.08,57.29 64.08,58.01 63.96,58.14 63.96,59.66 63.51,60.11 62.97,60.11 62.81,60.27 62.81,60.81 62.62,61 62.24,61 62.12,61.13 62.12,61.54 61.67,61.98 v1(61.67,66.17)
DDR3-CASN: length 6.3
  TOP w0.102: v1(59.7,65.41) 60.04,65.75 U3000.K3
  BOTTOM w0.102: v1(59.7,65.41) 59.7,60.14 59.83,60.01 RP3006.2
DDR3-CKE: length 15.1
  TOP w0.102: 59.64,70.57 59.64,69.63 59.89,69.38 60.27,69.38 60.46,69.19 60.46,67.82 60.37,67.73 58.69,67.73 58.56,67.6 58.56,67.35 58.69,67.22 59.39,67.22 v1(59.77,66.84) ; 59.64,70.57 U3000.J9 ; 59.64,70.57 U3000.K9
  BOTTOM w0.102: v1(59.77,66.84) 59.7,66.78 59.7,65.95 59.32,65.57 RP3006.1
DDR3-CLKN: length 12.8
  TOP w0.097: v1(59.89,68.27) 59.83,68.33 59.83,68.76 U3000.K7
  BOTTOM w0.097: R3005.1 v1(59.89,68.27) 59.73,68.11 59.73,67.88 59.45,67.6 59.25,67.6 59.01,67.36 59.01,67.16 58.45,66.6 58.21,66.6 57.16,65.56 57.16,63.1 57.33,62.93 57.33,62.56 57.09,62.31 56.21,62.31 56.09,62.18 56.09,62 56.21,61.87 57.27,61.87 57.52,61.62 57.52,61.26 57.42,61.16 57.42,60.88 R3009.1
DDR3-CLKP: length 13.3
  TOP w0.097: U3000.J7 59.48,68.97 59.58,68.87 59.58,68.52 v1(59.32,68.27)
  BOTTOM w0.097: R3004.1 58.94,68.65 v1(59.32,68.27) 59.48,68.12 59.48,68 59.33,67.85 59.12,67.85 58.77,67.49 58.77,67.29 58.33,66.85 58.08,66.85 56.91,65.68 56.91,62.98 57.09,62.81 57.09,62.68 56.96,62.56 56.09,62.56 55.84,62.31 55.84,61.87 56.09,61.62 57.15,61.62 57.27,61.5 57.27,61.36 57.16,61.25 57.16,61.07 R3010.1
